# EAGLE board Qwiic Power Switch-Panel (EAGLE 9.6.2), part 1 of 5
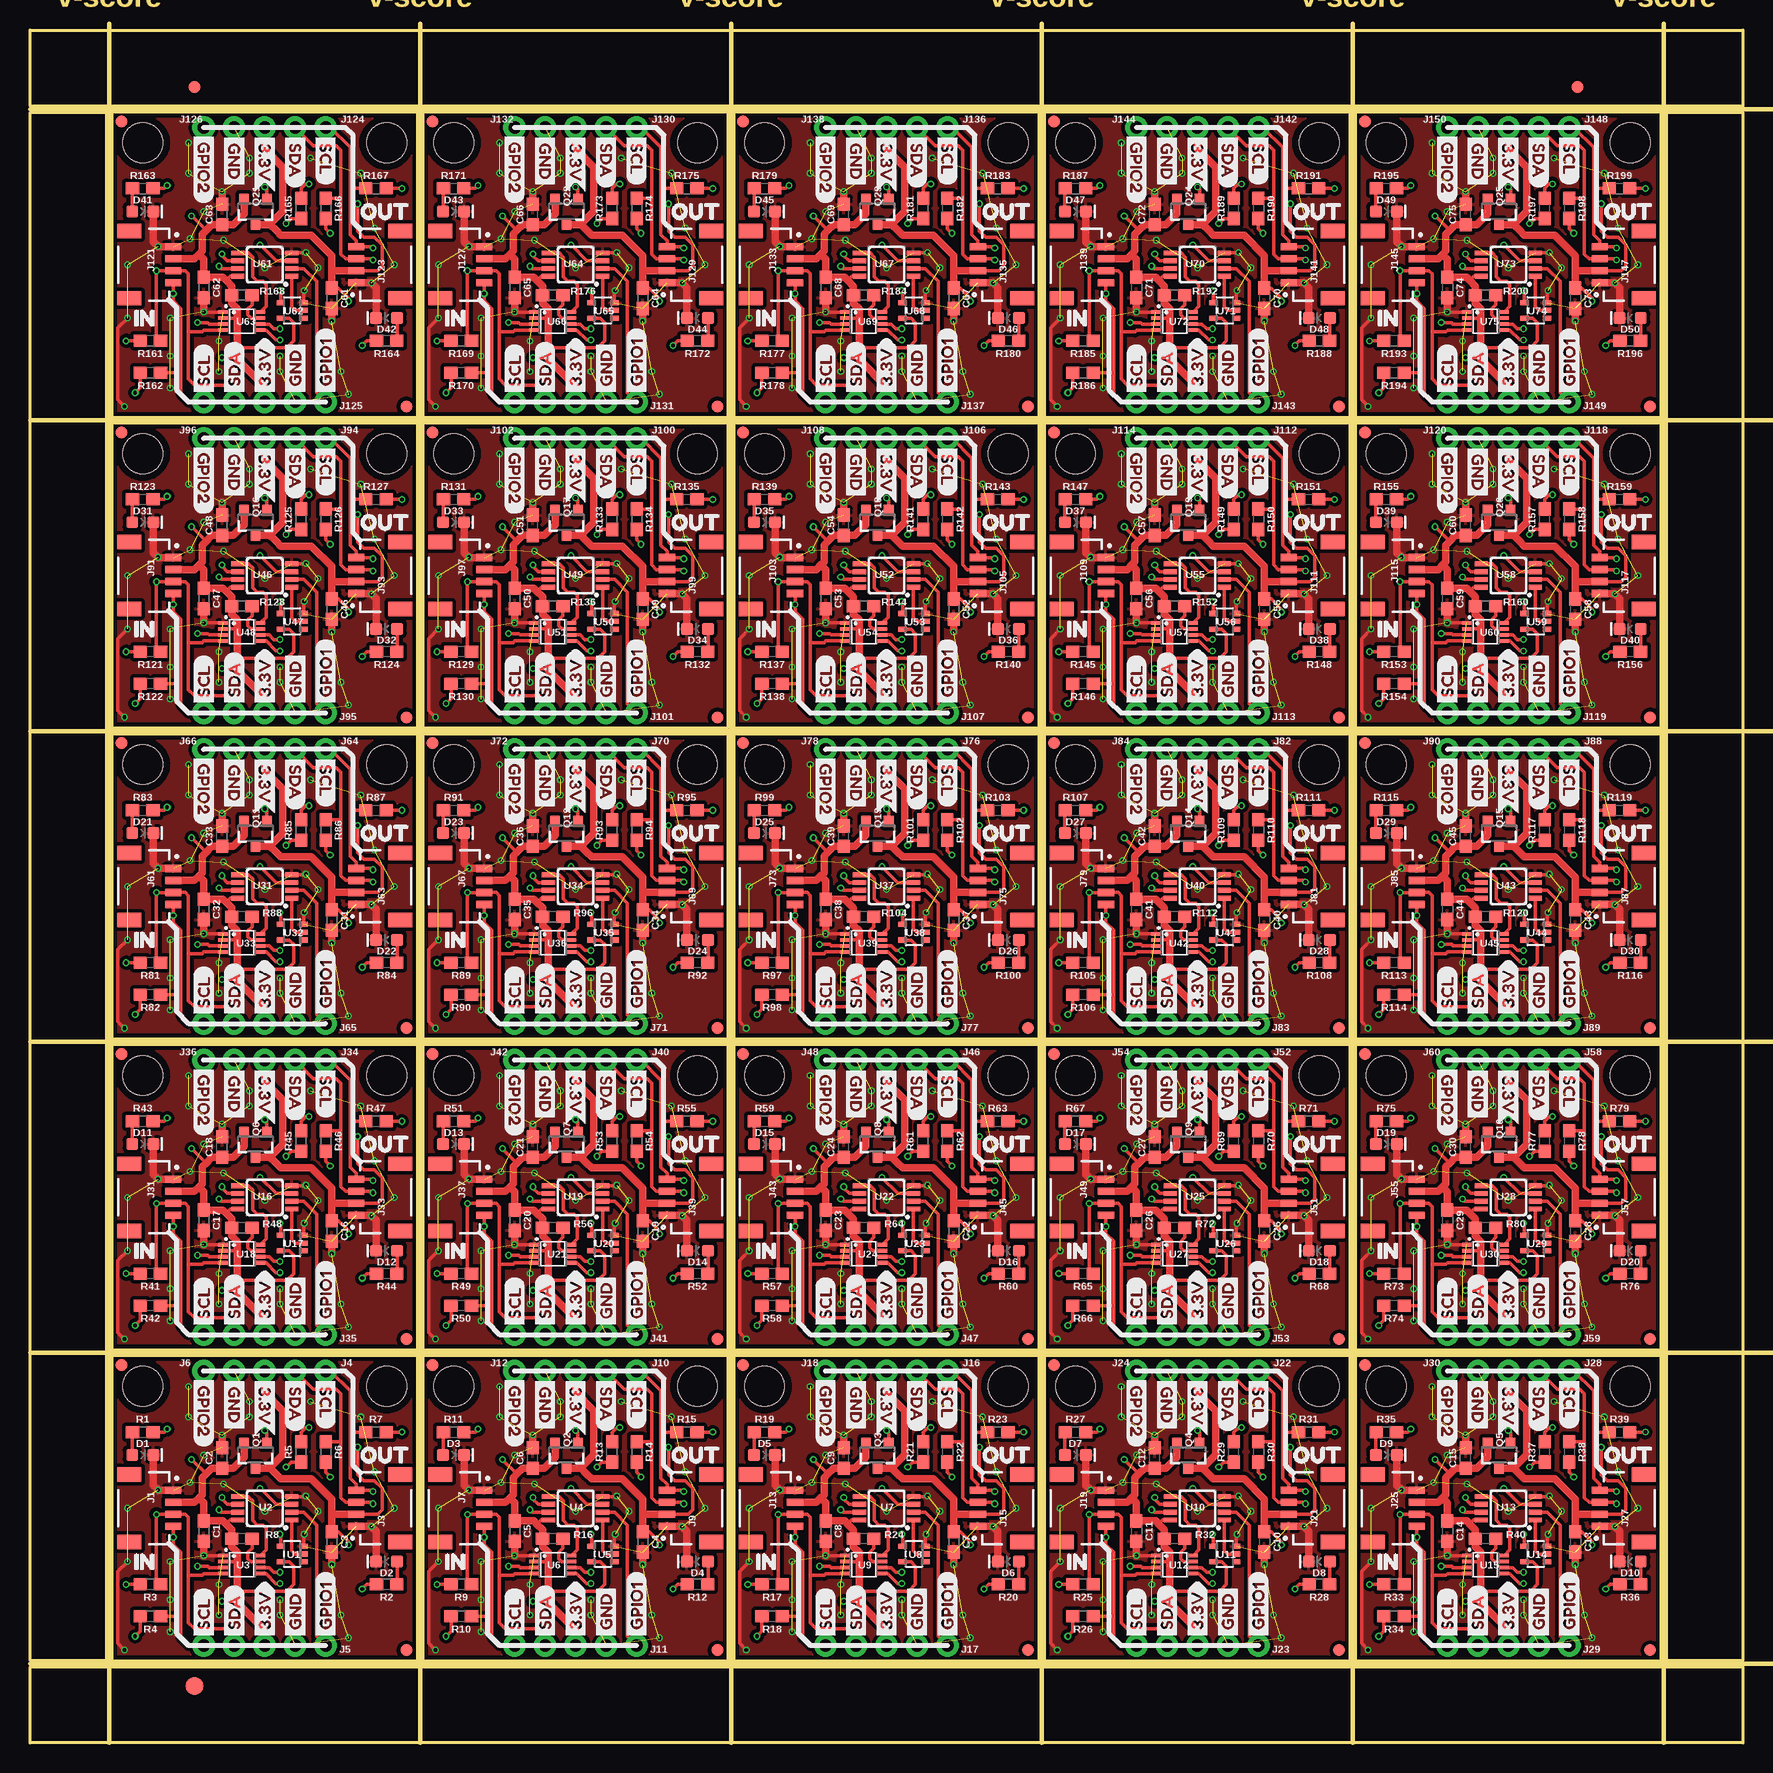
[diagram p0: board, top side]
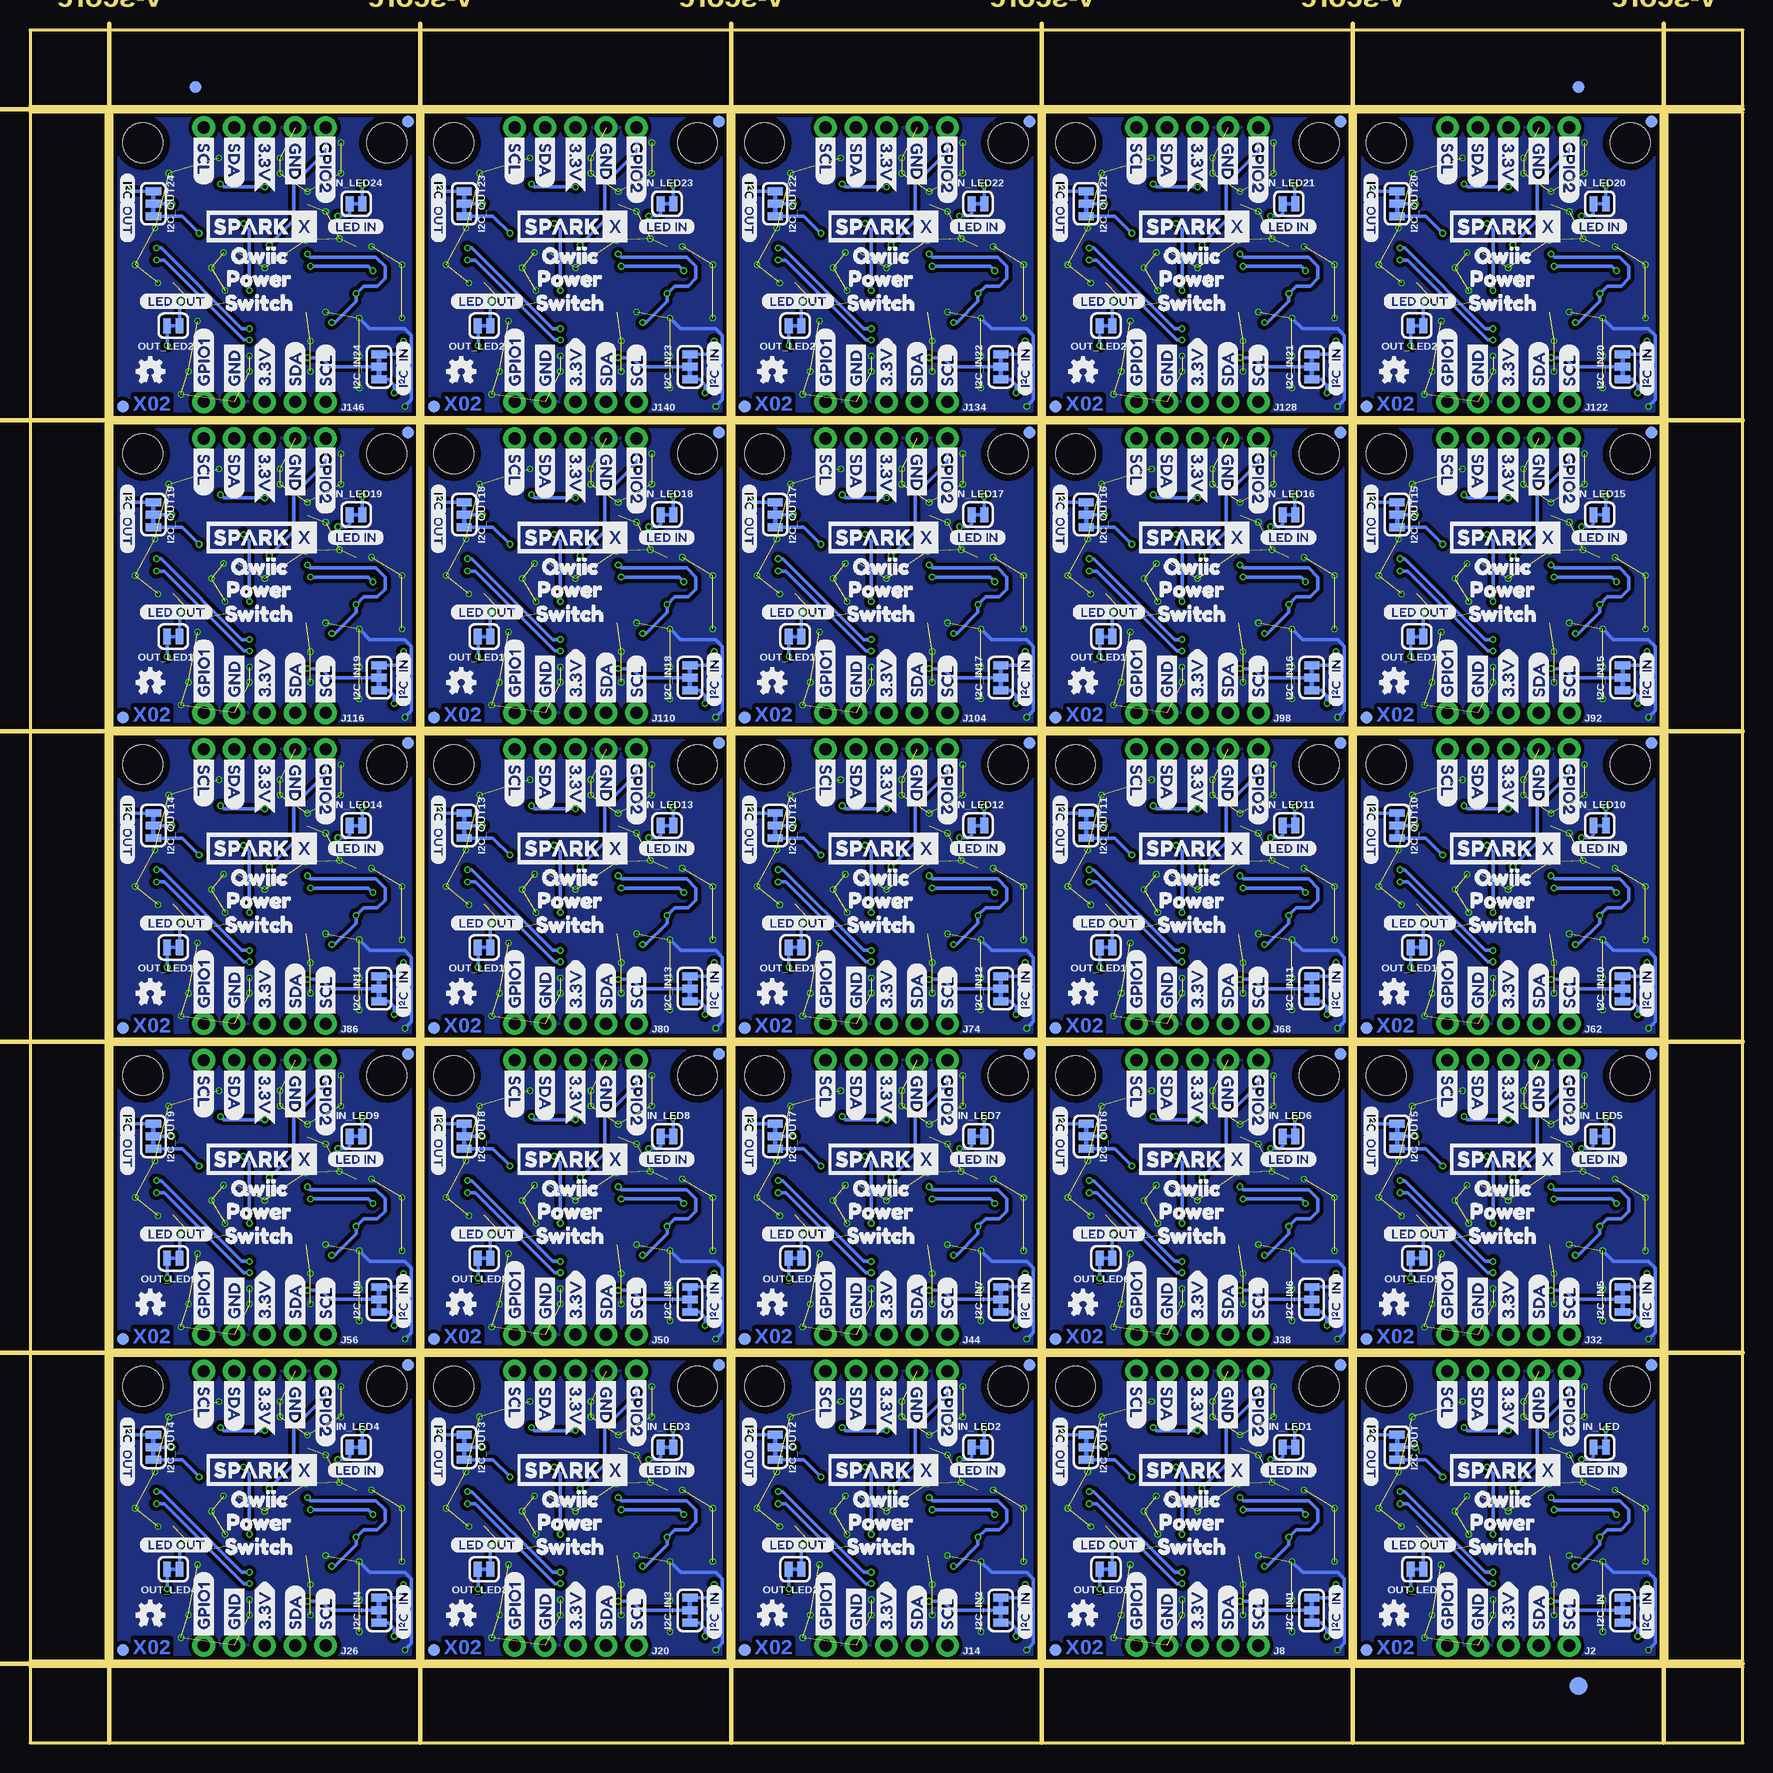
[diagram p1: board, bottom side, seen from below]

Size 142.75 x 142.75 mm. Coordinates in mm from the lower left corner, seen from the top.
Outline: 6.86,6.86 6.86,32.26 32.26,32.26 32.26,6.86 6.86,6.86
Outline: 32.77,6.86 32.77,32.26 58.17,32.26 58.17,6.86 32.77,6.86
Outline: 58.67,6.86 58.67,32.26 84.07,32.26 84.07,6.86 58.67,6.86
Outline: 84.58,6.86 84.58,32.26 109.98,32.26 109.98,6.86 84.58,6.86
Outline: 110.49,6.86 110.49,32.26 135.89,32.26 135.89,6.86 110.49,6.86
Outline: 6.86,32.77 6.86,58.17 32.26,58.17 32.26,32.77 6.86,32.77
Outline: 32.77,32.77 32.77,58.17 58.17,58.17 58.17,32.77 32.77,32.77
Outline: 58.67,32.77 58.67,58.17 84.07,58.17 84.07,32.77 58.67,32.77
Outline: 84.58,32.77 84.58,58.17 109.98,58.17 109.98,32.77 84.58,32.77
Outline: 110.49,32.77 110.49,58.17 135.89,58.17 135.89,32.77 110.49,32.77
Outline: 6.86,58.67 6.86,84.07 32.26,84.07 32.26,58.67 6.86,58.67
Outline: 32.77,58.67 32.77,84.07 58.17,84.07 58.17,58.67 32.77,58.67
Outline: 58.67,58.67 58.67,84.07 84.07,84.07 84.07,58.67 58.67,58.67
Outline: 84.58,58.67 84.58,84.07 109.98,84.07 109.98,58.67 84.58,58.67
Outline: 110.49,58.67 110.49,84.07 135.89,84.07 135.89,58.67 110.49,58.67
Outline: 6.86,84.58 6.86,109.98 32.26,109.98 32.26,84.58 6.86,84.58
Outline: 32.77,84.58 32.77,109.98 58.17,109.98 58.17,84.58 32.77,84.58
Outline: 58.67,84.58 58.67,109.98 84.07,109.98 84.07,84.58 58.67,84.58
Outline: 84.58,84.58 84.58,109.98 109.98,109.98 109.98,84.58 84.58,84.58
Outline: 110.49,84.58 110.49,109.98 135.89,109.98 135.89,84.58 110.49,84.58
Outline: 6.86,110.49 6.86,135.89 32.26,135.89 32.26,110.49 6.86,110.49
Outline: 32.77,110.49 32.77,135.89 58.17,135.89 58.17,110.49 32.77,110.49
Outline: 58.67,110.49 58.67,135.89 84.07,135.89 84.07,110.49 58.67,110.49
Outline: 84.58,110.49 84.58,135.89 109.98,135.89 109.98,110.49 84.58,110.49
Outline: 110.49,110.49 110.49,135.89 135.89,135.89 135.89,110.49 110.49,110.49
Outline: 0,6.35 142.75,6.35 142.75,0 0,0 0,6.35
Outline: 136.4,135.89 142.75,135.89 142.75,6.86 136.4,6.86 136.4,135.89
Outline: 0,142.75 142.75,142.75 142.75,136.4 0,136.4 0,142.75
Outline: 0,135.89 6.35,135.89 6.35,6.86 0,6.86 0,135.89
Copper layers (1*16): Top 0.035mm / dielectric 1.5mm / Bottom 0.035mm
Design rules "Qwiic Power Switch": minimum track width 5mil, minimum drill 0.3mm, track to track 5mil, track to pad 5mil, pad to pad 5mil, via to via 5mil, smd to smd 5mil, copper to edge 7mil, drill to drill 7mil, minimum pad ring 5mil, minimum via ring 5mil, stop-mask expansion 2.5mil, vias tented up to drill 25mil, thermal gap 10mil
Milling: 12 lines

## Footprints (pad centres in the part's own frame; a part is rotated, then mirrored left to right if it is on the bottom)
0603 = smd 1.1 x 1: 1 -0.85,0; 2 0.85,0
LED-0603 = smd 1 x 1: A -0.877,0; C 0.877,0
FIDUCIAL-1X2 = smd 1 x 1: 1 0,0
FIDUCIAL-1.5X3 = smd 1.5 x 1.5: 1 0,0
SMT-JUMPER_3_2-NC_TRACE_SILK = smd 0.66 x 1.27: 1 -1.041,0; 2 0,0; 3 1.041,0
SMT-JUMPER_2_NC_TRACE_SILK = smd 0.66 x 1.27: 1 -0.521,0; 2 0.521,0
JST04_1MM_RA = smd 0.6 x 1.35: 1 -1.5,0; 2 -0.5,0; 3 0.5,0; 4 1.5,0 | smd 1.2 x 2: NC1 2.8,-3.675; NC2 -2.8,-3.675
1X04_NO_SILK = drill 1.016 pad 1.88: 1 0,0; 2 2.54,0; 3 5.08,0; 4 7.62,0
1X01_NO_SILK = drill 1.016 pad 1.88: 1 0,0
STAND-OFF = hole 3.302: 0,0
SOT23-3 = smd 0.8 x 0.9: 1 -0.95,-1; 2 0.95,-1; 3 0,1.1
SOT353 = smd 0.42 x 0.7: 1 -0.65,-0.95; 2 0,-0.95; 3 0.65,-0.95; 4 0.65,0.95; 5 -0.65,0.95
MSOP8 = smd 1.1 x 0.4: 1 -2.25,0.975; 2 -2.25,0.325; 3 -2.25,-0.325; 4 -2.25,-0.975; 5 2.25,-0.975; 6 2.25,-0.325; 7 2.25,0.325; 8 2.25,0.975
VSSOP_8PIN = smd 0.8 x 0.3: P1 -1.55,0.75; P2 -1.55,0.25; P3 -1.55,-0.25; P4 -1.55,-0.75; P5 1.55,-0.75; P6 1.55,-0.25; P7 1.55,0.25; P8 1.55,0.75

## Placement (x,y rotation side)
C1  0.1uF  [0603]  14.48,17.65 270 top
C2  10uF  [0603]  16,23.75 90 top
C3  0.1uF  [0603]  25.15,16.76 270 top
C4  0.1uF  [0603]  51.05,16.76 270 top
C5  0.1uF  [0603]  40.39,17.65 270 top
C6  10uF  [0603]  41.91,23.75 90 top
C7  0.1uF  [0603]  76.96,16.76 270 top
C8  0.1uF  [0603]  66.29,17.65 270 top
C9  10uF  [0603]  67.82,23.75 90 top
C10  0.1uF  [0603]  102.87,16.76 270 top
C11  0.1uF  [0603]  92.2,17.65 270 top
C12  10uF  [0603]  93.73,23.75 90 top
C13  0.1uF  [0603]  128.78,16.76 270 top
C14  0.1uF  [0603]  118.11,17.65 270 top
C15  10uF  [0603]  119.63,23.75 90 top
C16  0.1uF  [0603]  25.15,42.67 270 top
C17  0.1uF  [0603]  14.48,43.56 270 top
C18  10uF  [0603]  16,49.66 90 top
C19  0.1uF  [0603]  51.05,42.67 270 top
C20  0.1uF  [0603]  40.39,43.56 270 top
C21  10uF  [0603]  41.91,49.66 90 top
C22  0.1uF  [0603]  76.96,42.67 270 top
C23  0.1uF  [0603]  66.29,43.56 270 top
C24  10uF  [0603]  67.82,49.66 90 top
C25  0.1uF  [0603]  102.87,42.67 270 top
C26  0.1uF  [0603]  92.2,43.56 270 top
C27  10uF  [0603]  93.73,49.66 90 top
C28  0.1uF  [0603]  128.78,42.67 270 top
C29  0.1uF  [0603]  118.11,43.56 270 top
C30  10uF  [0603]  119.63,49.66 90 top
C31  0.1uF  [0603]  25.15,68.58 270 top
C32  0.1uF  [0603]  14.48,69.47 270 top
C33  10uF  [0603]  16,75.56 90 top
C34  0.1uF  [0603]  51.05,68.58 270 top
C35  0.1uF  [0603]  40.39,69.47 270 top
C36  10uF  [0603]  41.91,75.56 90 top
C37  0.1uF  [0603]  76.96,68.58 270 top
C38  0.1uF  [0603]  66.29,69.47 270 top
C39  10uF  [0603]  67.82,75.56 90 top
C40  0.1uF  [0603]  102.87,68.58 270 top
C41  0.1uF  [0603]  92.2,69.47 270 top
C42  10uF  [0603]  93.73,75.56 90 top
C43  0.1uF  [0603]  128.78,68.58 270 top
C44  0.1uF  [0603]  118.11,69.47 270 top
C45  10uF  [0603]  119.63,75.56 90 top
C46  0.1uF  [0603]  25.15,94.49 270 top
C47  0.1uF  [0603]  14.48,95.38 270 top
C48  10uF  [0603]  16,101.47 90 top
C49  0.1uF  [0603]  51.05,94.49 270 top
C50  0.1uF  [0603]  40.39,95.38 270 top
C51  10uF  [0603]  41.91,101.47 90 top
C52  0.1uF  [0603]  76.96,94.49 270 top
C53  0.1uF  [0603]  66.29,95.38 270 top
C54  10uF  [0603]  67.82,101.47 90 top
C55  0.1uF  [0603]  102.87,94.49 270 top
C56  0.1uF  [0603]  92.2,95.38 270 top
C57  10uF  [0603]  93.73,101.47 90 top
C58  0.1uF  [0603]  128.78,94.49 270 top
C59  0.1uF  [0603]  118.11,95.38 270 top
C60  10uF  [0603]  119.63,101.47 90 top
C61  0.1uF  [0603]  25.15,120.4 270 top
C62  0.1uF  [0603]  14.48,121.29 270 top
C63  10uF  [0603]  16,127.38 90 top
C64  0.1uF  [0603]  51.05,120.4 270 top
C65  0.1uF  [0603]  40.39,121.29 270 top
C66  10uF  [0603]  41.91,127.38 90 top
C67  0.1uF  [0603]  76.96,120.4 270 top
C68  0.1uF  [0603]  66.29,121.29 270 top
C69  10uF  [0603]  67.82,127.38 90 top
C70  0.1uF  [0603]  102.87,120.4 270 top
C71  0.1uF  [0603]  92.2,121.29 270 top
C72  10uF  [0603]  93.73,127.38 90 top
C73  0.1uF  [0603]  128.78,120.4 270 top
C74  0.1uF  [0603]  118.11,121.29 270 top
C75  10uF  [0603]  119.63,127.38 90 top
D1  RED  [LED-0603]  9.4,24 0 top
D2  GREEN  [LED-0603]  29.72,15.11 180 top
D3  RED  [LED-0603]  35.31,24 0 top
D4  GREEN  [LED-0603]  55.63,15.11 180 top
D5  RED  [LED-0603]  61.21,24 0 top
D6  GREEN  [LED-0603]  81.53,15.11 180 top
D7  RED  [LED-0603]  87.12,24 0 top
D8  GREEN  [LED-0603]  107.44,15.11 180 top
D9  RED  [LED-0603]  113.03,24 0 top
D10  GREEN  [LED-0603]  133.35,15.11 180 top
D11  RED  [LED-0603]  9.4,49.91 0 top
D12  GREEN  [LED-0603]  29.72,41.02 180 top
D13  RED  [LED-0603]  35.31,49.91 0 top
D14  GREEN  [LED-0603]  55.63,41.02 180 top
D15  RED  [LED-0603]  61.21,49.91 0 top
D16  GREEN  [LED-0603]  81.53,41.02 180 top
D17  RED  [LED-0603]  87.12,49.91 0 top
D18  GREEN  [LED-0603]  107.44,41.02 180 top
D19  RED  [LED-0603]  113.03,49.91 0 top
D20  GREEN  [LED-0603]  133.35,41.02 180 top
D21  RED  [LED-0603]  9.4,75.82 0 top
D22  GREEN  [LED-0603]  29.72,66.93 180 top
D23  RED  [LED-0603]  35.31,75.82 0 top
D24  GREEN  [LED-0603]  55.63,66.93 180 top
D25  RED  [LED-0603]  61.21,75.82 0 top
D26  GREEN  [LED-0603]  81.53,66.93 180 top
D27  RED  [LED-0603]  87.12,75.82 0 top
D28  GREEN  [LED-0603]  107.44,66.93 180 top
D29  RED  [LED-0603]  113.03,75.82 0 top
D30  GREEN  [LED-0603]  133.35,66.93 180 top
D31  RED  [LED-0603]  9.4,101.73 0 top
D32  GREEN  [LED-0603]  29.72,92.84 180 top
D33  RED  [LED-0603]  35.31,101.73 0 top
D34  GREEN  [LED-0603]  55.63,92.84 180 top
D35  RED  [LED-0603]  61.21,101.73 0 top
D36  GREEN  [LED-0603]  81.53,92.84 180 top
D37  RED  [LED-0603]  87.12,101.73 0 top
D38  GREEN  [LED-0603]  107.44,92.84 180 top
D39  RED  [LED-0603]  113.03,101.73 0 top
D40  GREEN  [LED-0603]  133.35,92.84 180 top
D41  RED  [LED-0603]  9.4,127.64 0 top
D42  GREEN  [LED-0603]  29.72,118.75 180 top
D43  RED  [LED-0603]  35.31,127.64 0 top
D44  GREEN  [LED-0603]  55.63,118.75 180 top
D45  RED  [LED-0603]  61.21,127.64 0 top
D46  GREEN  [LED-0603]  81.53,118.75 180 top
D47  RED  [LED-0603]  87.12,127.64 0 top
D48  GREEN  [LED-0603]  107.44,118.75 180 top
D49  RED  [LED-0603]  113.03,127.64 0 top
D50  GREEN  [LED-0603]  133.35,118.75 180 top
E$1  [FIDUCIAL-1X2]  13.72,137.99 0 top
E$2  [FIDUCIAL-1X2]  13.72,137.99 0 bottom
E$3  [FIDUCIAL-1X2]  128.97,137.99 0 top
E$4  [FIDUCIAL-1X2]  128.97,137.99 0 bottom
E$5  [FIDUCIAL-1.5X3]  13.72,4.76 0 top
E$6  [FIDUCIAL-1.5X3]  13.72,4.76 0 bottom
I2C_IN  JUMPER-SMT_3_2-NC_TRACE_SILK  [SMT-JUMPER_3_2-NC_TRACE_SILK]  10.03,11.05 90 bottom
I2C_IN1  JUMPER-SMT_3_2-NC_TRACE_SILK  [SMT-JUMPER_3_2-NC_TRACE_SILK]  35.94,11.05 90 bottom
I2C_IN2  JUMPER-SMT_3_2-NC_TRACE_SILK  [SMT-JUMPER_3_2-NC_TRACE_SILK]  61.85,11.05 90 bottom
I2C_IN3  JUMPER-SMT_3_2-NC_TRACE_SILK  [SMT-JUMPER_3_2-NC_TRACE_SILK]  87.76,11.05 90 bottom
I2C_IN4  JUMPER-SMT_3_2-NC_TRACE_SILK  [SMT-JUMPER_3_2-NC_TRACE_SILK]  113.67,11.05 90 bottom
I2C_IN5  JUMPER-SMT_3_2-NC_TRACE_SILK  [SMT-JUMPER_3_2-NC_TRACE_SILK]  10.03,36.96 90 bottom
I2C_IN6  JUMPER-SMT_3_2-NC_TRACE_SILK  [SMT-JUMPER_3_2-NC_TRACE_SILK]  35.94,36.96 90 bottom
I2C_IN7  JUMPER-SMT_3_2-NC_TRACE_SILK  [SMT-JUMPER_3_2-NC_TRACE_SILK]  61.85,36.96 90 bottom
I2C_IN8  JUMPER-SMT_3_2-NC_TRACE_SILK  [SMT-JUMPER_3_2-NC_TRACE_SILK]  87.76,36.96 90 bottom
I2C_IN9  JUMPER-SMT_3_2-NC_TRACE_SILK  [SMT-JUMPER_3_2-NC_TRACE_SILK]  113.67,36.96 90 bottom
I2C_IN10  JUMPER-SMT_3_2-NC_TRACE_SILK  [SMT-JUMPER_3_2-NC_TRACE_SILK]  10.03,62.86 90 bottom
I2C_IN11  JUMPER-SMT_3_2-NC_TRACE_SILK  [SMT-JUMPER_3_2-NC_TRACE_SILK]  35.94,62.86 90 bottom
I2C_IN12  JUMPER-SMT_3_2-NC_TRACE_SILK  [SMT-JUMPER_3_2-NC_TRACE_SILK]  61.85,62.86 90 bottom
I2C_IN13  JUMPER-SMT_3_2-NC_TRACE_SILK  [SMT-JUMPER_3_2-NC_TRACE_SILK]  87.76,62.86 90 bottom
I2C_IN14  JUMPER-SMT_3_2-NC_TRACE_SILK  [SMT-JUMPER_3_2-NC_TRACE_SILK]  113.67,62.86 90 bottom
I2C_IN15  JUMPER-SMT_3_2-NC_TRACE_SILK  [SMT-JUMPER_3_2-NC_TRACE_SILK]  10.03,88.77 90 bottom
I2C_IN16  JUMPER-SMT_3_2-NC_TRACE_SILK  [SMT-JUMPER_3_2-NC_TRACE_SILK]  35.94,88.77 90 bottom
I2C_IN17  JUMPER-SMT_3_2-NC_TRACE_SILK  [SMT-JUMPER_3_2-NC_TRACE_SILK]  61.85,88.77 90 bottom
I2C_IN18  JUMPER-SMT_3_2-NC_TRACE_SILK  [SMT-JUMPER_3_2-NC_TRACE_SILK]  87.76,88.77 90 bottom
I2C_IN19  JUMPER-SMT_3_2-NC_TRACE_SILK  [SMT-JUMPER_3_2-NC_TRACE_SILK]  113.67,88.77 90 bottom
I2C_IN20  JUMPER-SMT_3_2-NC_TRACE_SILK  [SMT-JUMPER_3_2-NC_TRACE_SILK]  10.03,114.68 90 bottom
I2C_IN21  JUMPER-SMT_3_2-NC_TRACE_SILK  [SMT-JUMPER_3_2-NC_TRACE_SILK]  35.94,114.68 90 bottom
I2C_IN22  JUMPER-SMT_3_2-NC_TRACE_SILK  [SMT-JUMPER_3_2-NC_TRACE_SILK]  61.85,114.68 90 bottom
I2C_IN23  JUMPER-SMT_3_2-NC_TRACE_SILK  [SMT-JUMPER_3_2-NC_TRACE_SILK]  87.76,114.68 90 bottom
I2C_IN24  JUMPER-SMT_3_2-NC_TRACE_SILK  [SMT-JUMPER_3_2-NC_TRACE_SILK]  113.67,114.68 90 bottom
I2C_OUT  JUMPER-SMT_3_2-NC_TRACE_SILK  [SMT-JUMPER_3_2-NC_TRACE_SILK]  28.83,24.64 270 bottom
I2C_OUT1  JUMPER-SMT_3_2-NC_TRACE_SILK  [SMT-JUMPER_3_2-NC_TRACE_SILK]  54.74,24.64 270 bottom
I2C_OUT2  JUMPER-SMT_3_2-NC_TRACE_SILK  [SMT-JUMPER_3_2-NC_TRACE_SILK]  80.65,24.64 270 bottom
I2C_OUT3  JUMPER-SMT_3_2-NC_TRACE_SILK  [SMT-JUMPER_3_2-NC_TRACE_SILK]  106.55,24.64 270 bottom
I2C_OUT4  JUMPER-SMT_3_2-NC_TRACE_SILK  [SMT-JUMPER_3_2-NC_TRACE_SILK]  132.46,24.64 270 bottom
I2C_OUT5  JUMPER-SMT_3_2-NC_TRACE_SILK  [SMT-JUMPER_3_2-NC_TRACE_SILK]  28.83,50.55 270 bottom
I2C_OUT6  JUMPER-SMT_3_2-NC_TRACE_SILK  [SMT-JUMPER_3_2-NC_TRACE_SILK]  54.74,50.55 270 bottom
I2C_OUT7  JUMPER-SMT_3_2-NC_TRACE_SILK  [SMT-JUMPER_3_2-NC_TRACE_SILK]  80.65,50.55 270 bottom
I2C_OUT8  JUMPER-SMT_3_2-NC_TRACE_SILK  [SMT-JUMPER_3_2-NC_TRACE_SILK]  106.55,50.55 270 bottom
I2C_OUT9  JUMPER-SMT_3_2-NC_TRACE_SILK  [SMT-JUMPER_3_2-NC_TRACE_SILK]  132.46,50.55 270 bottom
I2C_OUT10  JUMPER-SMT_3_2-NC_TRACE_SILK  [SMT-JUMPER_3_2-NC_TRACE_SILK]  28.83,76.45 270 bottom
I2C_OUT11  JUMPER-SMT_3_2-NC_TRACE_SILK  [SMT-JUMPER_3_2-NC_TRACE_SILK]  54.74,76.45 270 bottom
I2C_OUT12  JUMPER-SMT_3_2-NC_TRACE_SILK  [SMT-JUMPER_3_2-NC_TRACE_SILK]  80.65,76.45 270 bottom
I2C_OUT13  JUMPER-SMT_3_2-NC_TRACE_SILK  [SMT-JUMPER_3_2-NC_TRACE_SILK]  106.55,76.45 270 bottom
I2C_OUT14  JUMPER-SMT_3_2-NC_TRACE_SILK  [SMT-JUMPER_3_2-NC_TRACE_SILK]  132.46,76.45 270 bottom
I2C_OUT15  JUMPER-SMT_3_2-NC_TRACE_SILK  [SMT-JUMPER_3_2-NC_TRACE_SILK]  28.83,102.36 270 bottom
I2C_OUT16  JUMPER-SMT_3_2-NC_TRACE_SILK  [SMT-JUMPER_3_2-NC_TRACE_SILK]  54.74,102.36 270 bottom
I2C_OUT17  JUMPER-SMT_3_2-NC_TRACE_SILK  [SMT-JUMPER_3_2-NC_TRACE_SILK]  80.65,102.36 270 bottom
I2C_OUT18  JUMPER-SMT_3_2-NC_TRACE_SILK  [SMT-JUMPER_3_2-NC_TRACE_SILK]  106.55,102.36 270 bottom
I2C_OUT19  JUMPER-SMT_3_2-NC_TRACE_SILK  [SMT-JUMPER_3_2-NC_TRACE_SILK]  132.46,102.36 270 bottom
I2C_OUT20  JUMPER-SMT_3_2-NC_TRACE_SILK  [SMT-JUMPER_3_2-NC_TRACE_SILK]  28.83,128.27 270 bottom
I2C_OUT21  JUMPER-SMT_3_2-NC_TRACE_SILK  [SMT-JUMPER_3_2-NC_TRACE_SILK]  54.74,128.27 270 bottom
I2C_OUT22  JUMPER-SMT_3_2-NC_TRACE_SILK  [SMT-JUMPER_3_2-NC_TRACE_SILK]  80.65,128.27 270 bottom
I2C_OUT23  JUMPER-SMT_3_2-NC_TRACE_SILK  [SMT-JUMPER_3_2-NC_TRACE_SILK]  106.55,128.27 270 bottom
I2C_OUT24  JUMPER-SMT_3_2-NC_TRACE_SILK  [SMT-JUMPER_3_2-NC_TRACE_SILK]  132.46,128.27 270 bottom
IN_LED  IN_LED  [SMT-JUMPER_2_NC_TRACE_SILK]  11.94,24.64 180 bottom
IN_LED1  IN_LED  [SMT-JUMPER_2_NC_TRACE_SILK]  37.85,24.64 180 bottom
IN_LED2  IN_LED  [SMT-JUMPER_2_NC_TRACE_SILK]  63.75,24.64 180 bottom
IN_LED3  IN_LED  [SMT-JUMPER_2_NC_TRACE_SILK]  89.66,24.64 180 bottom
IN_LED4  IN_LED  [SMT-JUMPER_2_NC_TRACE_SILK]  115.57,24.64 180 bottom
IN_LED5  IN_LED  [SMT-JUMPER_2_NC_TRACE_SILK]  11.94,50.55 180 bottom
IN_LED6  IN_LED  [SMT-JUMPER_2_NC_TRACE_SILK]  37.85,50.55 180 bottom
IN_LED7  IN_LED  [SMT-JUMPER_2_NC_TRACE_SILK]  63.75,50.55 180 bottom
IN_LED8  IN_LED  [SMT-JUMPER_2_NC_TRACE_SILK]  89.66,50.55 180 bottom
IN_LED9  IN_LED  [SMT-JUMPER_2_NC_TRACE_SILK]  115.57,50.55 180 bottom
IN_LED10  IN_LED  [SMT-JUMPER_2_NC_TRACE_SILK]  11.94,76.45 180 bottom
IN_LED11  IN_LED  [SMT-JUMPER_2_NC_TRACE_SILK]  37.85,76.45 180 bottom
IN_LED12  IN_LED  [SMT-JUMPER_2_NC_TRACE_SILK]  63.75,76.45 180 bottom
IN_LED13  IN_LED  [SMT-JUMPER_2_NC_TRACE_SILK]  89.66,76.45 180 bottom
IN_LED14  IN_LED  [SMT-JUMPER_2_NC_TRACE_SILK]  115.57,76.45 180 bottom
IN_LED15  IN_LED  [SMT-JUMPER_2_NC_TRACE_SILK]  11.94,102.36 180 bottom
IN_LED16  IN_LED  [SMT-JUMPER_2_NC_TRACE_SILK]  37.85,102.36 180 bottom
IN_LED17  IN_LED  [SMT-JUMPER_2_NC_TRACE_SILK]  63.75,102.36 180 bottom
IN_LED18  IN_LED  [SMT-JUMPER_2_NC_TRACE_SILK]  89.66,102.36 180 bottom
IN_LED19  IN_LED  [SMT-JUMPER_2_NC_TRACE_SILK]  115.57,102.36 180 bottom
IN_LED20  IN_LED  [SMT-JUMPER_2_NC_TRACE_SILK]  11.94,128.27 180 bottom
IN_LED21  IN_LED  [SMT-JUMPER_2_NC_TRACE_SILK]  37.85,128.27 180 bottom
IN_LED22  IN_LED  [SMT-JUMPER_2_NC_TRACE_SILK]  63.75,128.27 180 bottom
IN_LED23  IN_LED  [SMT-JUMPER_2_NC_TRACE_SILK]  89.66,128.27 180 bottom
IN_LED24  IN_LED  [SMT-JUMPER_2_NC_TRACE_SILK]  115.57,128.27 180 bottom
J1  Qwiic Right Angle  [JST04_1MM_RA]  11.94,19.56 270 top
J2  PTH  [1X04_NO_SILK]  22.1,8.13 0 bottom
J3  Qwiic Right Angle  [JST04_1MM_RA]  27.18,19.56 90 top
J4  PTH  [1X04_NO_SILK]  17.02,30.99 0 top
J5  [1X01_NO_SILK]  24.64,8.13 0 top
J6  [1X01_NO_SILK]  14.48,30.99 0 top
J7  Qwiic Right Angle  [JST04_1MM_RA]  37.85,19.56 270 top
J8  PTH  [1X04_NO_SILK]  48.01,8.13 0 bottom
J9  Qwiic Right Angle  [JST04_1MM_RA]  53.09,19.56 90 top
J10  PTH  [1X04_NO_SILK]  42.93,30.99 0 top
J11  [1X01_NO_SILK]  50.55,8.13 0 top
J12  [1X01_NO_SILK]  40.39,30.99 0 top
J13  Qwiic Right Angle  [JST04_1MM_RA]  63.75,19.56 270 top
J14  PTH  [1X04_NO_SILK]  73.91,8.13 0 bottom
J15  Qwiic Right Angle  [JST04_1MM_RA]  78.99,19.56 90 top
J16  PTH  [1X04_NO_SILK]  68.83,30.99 0 top
J17  [1X01_NO_SILK]  76.45,8.13 0 top
J18  [1X01_NO_SILK]  66.29,30.99 0 top
J19  Qwiic Right Angle  [JST04_1MM_RA]  89.66,19.56 270 top
J20  PTH  [1X04_NO_SILK]  99.82,8.13 0 bottom
J21  Qwiic Right Angle  [JST04_1MM_RA]  104.9,19.56 90 top
J22  PTH  [1X04_NO_SILK]  94.74,30.99 0 top
J23  [1X01_NO_SILK]  102.36,8.13 0 top
J24  [1X01_NO_SILK]  92.2,30.99 0 top
J25  Qwiic Right Angle  [JST04_1MM_RA]  115.57,19.56 270 top
J26  PTH  [1X04_NO_SILK]  125.73,8.13 0 bottom
J27  Qwiic Right Angle  [JST04_1MM_RA]  130.81,19.56 90 top
J28  PTH  [1X04_NO_SILK]  120.65,30.99 0 top
J29  [1X01_NO_SILK]  128.27,8.13 0 top
J30  [1X01_NO_SILK]  118.11,30.99 0 top
J31  Qwiic Right Angle  [JST04_1MM_RA]  11.94,45.47 270 top
J32  PTH  [1X04_NO_SILK]  22.1,34.04 0 bottom
J33  Qwiic Right Angle  [JST04_1MM_RA]  27.18,45.47 90 top
J34  PTH  [1X04_NO_SILK]  17.02,56.9 0 top
J35  [1X01_NO_SILK]  24.64,34.04 0 top
J36  [1X01_NO_SILK]  14.48,56.9 0 top
J37  Qwiic Right Angle  [JST04_1MM_RA]  37.85,45.47 270 top
J38  PTH  [1X04_NO_SILK]  48.01,34.04 0 bottom
J39  Qwiic Right Angle  [JST04_1MM_RA]  53.09,45.47 90 top
J40  PTH  [1X04_NO_SILK]  42.93,56.9 0 top
J41  [1X01_NO_SILK]  50.55,34.04 0 top
J42  [1X01_NO_SILK]  40.39,56.9 0 top
J43  Qwiic Right Angle  [JST04_1MM_RA]  63.75,45.47 270 top
J44  PTH  [1X04_NO_SILK]  73.91,34.04 0 bottom
J45  Qwiic Right Angle  [JST04_1MM_RA]  78.99,45.47 90 top
J46  PTH  [1X04_NO_SILK]  68.83,56.9 0 top
J47  [1X01_NO_SILK]  76.45,34.04 0 top
J48  [1X01_NO_SILK]  66.29,56.9 0 top
J49  Qwiic Right Angle  [JST04_1MM_RA]  89.66,45.47 270 top
J50  PTH  [1X04_NO_SILK]  99.82,34.04 0 bottom
J51  Qwiic Right Angle  [JST04_1MM_RA]  104.9,45.47 90 top
J52  PTH  [1X04_NO_SILK]  94.74,56.9 0 top
J53  [1X01_NO_SILK]  102.36,34.04 0 top
J54  [1X01_NO_SILK]  92.2,56.9 0 top
J55  Qwiic Right Angle  [JST04_1MM_RA]  115.57,45.47 270 top
J56  PTH  [1X04_NO_SILK]  125.73,34.04 0 bottom
J57  Qwiic Right Angle  [JST04_1MM_RA]  130.81,45.47 90 top
J58  PTH  [1X04_NO_SILK]  120.65,56.9 0 top
J59  [1X01_NO_SILK]  128.27,34.04 0 top
J60  [1X01_NO_SILK]  118.11,56.9 0 top
J61  Qwiic Right Angle  [JST04_1MM_RA]  11.94,71.37 270 top
J62  PTH  [1X04_NO_SILK]  22.1,59.94 0 bottom
J63  Qwiic Right Angle  [JST04_1MM_RA]  27.18,71.37 90 top
J64  PTH  [1X04_NO_SILK]  17.02,82.8 0 top
J65  [1X01_NO_SILK]  24.64,59.94 0 top
J66  [1X01_NO_SILK]  14.48,82.8 0 top
J67  Qwiic Right Angle  [JST04_1MM_RA]  37.85,71.37 270 top
J68  PTH  [1X04_NO_SILK]  48.01,59.94 0 bottom
J69  Qwiic Right Angle  [JST04_1MM_RA]  53.09,71.37 90 top
J70  PTH  [1X04_NO_SILK]  42.93,82.8 0 top
J71  [1X01_NO_SILK]  50.55,59.94 0 top
J72  [1X01_NO_SILK]  40.39,82.8 0 top
J73  Qwiic Right Angle  [JST04_1MM_RA]  63.75,71.37 270 top
J74  PTH  [1X04_NO_SILK]  73.91,59.94 0 bottom
J75  Qwiic Right Angle  [JST04_1MM_RA]  78.99,71.37 90 top
J76  PTH  [1X04_NO_SILK]  68.83,82.8 0 top
J77  [1X01_NO_SILK]  76.45,59.94 0 top
J78  [1X01_NO_SILK]  66.29,82.8 0 top
J79  Qwiic Right Angle  [JST04_1MM_RA]  89.66,71.37 270 top
J80  PTH  [1X04_NO_SILK]  99.82,59.94 0 bottom
J81  Qwiic Right Angle  [JST04_1MM_RA]  104.9,71.37 90 top
J82  PTH  [1X04_NO_SILK]  94.74,82.8 0 top
J83  [1X01_NO_SILK]  102.36,59.94 0 top
J84  [1X01_NO_SILK]  92.2,82.8 0 top
J85  Qwiic Right Angle  [JST04_1MM_RA]  115.57,71.37 270 top
J86  PTH  [1X04_NO_SILK]  125.73,59.94 0 bottom
J87  Qwiic Right Angle  [JST04_1MM_RA]  130.81,71.37 90 top
J88  PTH  [1X04_NO_SILK]  120.65,82.8 0 top
J89  [1X01_NO_SILK]  128.27,59.94 0 top
J90  [1X01_NO_SILK]  118.11,82.8 0 top
J91  Qwiic Right Angle  [JST04_1MM_RA]  11.94,97.28 270 top
J92  PTH  [1X04_NO_SILK]  22.1,85.85 0 bottom
J93  Qwiic Right Angle  [JST04_1MM_RA]  27.18,97.28 90 top
J94  PTH  [1X04_NO_SILK]  17.02,108.71 0 top
J95  [1X01_NO_SILK]  24.64,85.85 0 top
J96  [1X01_NO_SILK]  14.48,108.71 0 top
J97  Qwiic Right Angle  [JST04_1MM_RA]  37.85,97.28 270 top
J98  PTH  [1X04_NO_SILK]  48.01,85.85 0 bottom
J99  Qwiic Right Angle  [JST04_1MM_RA]  53.09,97.28 90 top
J100  PTH  [1X04_NO_SILK]  42.93,108.71 0 top
J101  [1X01_NO_SILK]  50.55,85.85 0 top
J102  [1X01_NO_SILK]  40.39,108.71 0 top
J103  Qwiic Right Angle  [JST04_1MM_RA]  63.75,97.28 270 top
J104  PTH  [1X04_NO_SILK]  73.91,85.85 0 bottom
J105  Qwiic Right Angle  [JST04_1MM_RA]  78.99,97.28 90 top
J106  PTH  [1X04_NO_SILK]  68.83,108.71 0 top
J107  [1X01_NO_SILK]  76.45,85.85 0 top
J108  [1X01_NO_SILK]  66.29,108.71 0 top
J109  Qwiic Right Angle  [JST04_1MM_RA]  89.66,97.28 270 top
J110  PTH  [1X04_NO_SILK]  99.82,85.85 0 bottom
J111  Qwiic Right Angle  [JST04_1MM_RA]  104.9,97.28 90 top
J112  PTH  [1X04_NO_SILK]  94.74,108.71 0 top
J113  [1X01_NO_SILK]  102.36,85.85 0 top
J114  [1X01_NO_SILK]  92.2,108.71 0 top
J115  Qwiic Right Angle  [JST04_1MM_RA]  115.57,97.28 270 top
J116  PTH  [1X04_NO_SILK]  125.73,85.85 0 bottom
J117  Qwiic Right Angle  [JST04_1MM_RA]  130.81,97.28 90 top
J118  PTH  [1X04_NO_SILK]  120.65,108.71 0 top
J119  [1X01_NO_SILK]  128.27,85.85 0 top
J120  [1X01_NO_SILK]  118.11,108.71 0 top
J121  Qwiic Right Angle  [JST04_1MM_RA]  11.94,123.19 270 top
J122  PTH  [1X04_NO_SILK]  22.1,111.76 0 bottom
J123  Qwiic Right Angle  [JST04_1MM_RA]  27.18,123.19 90 top
J124  PTH  [1X04_NO_SILK]  17.02,134.62 0 top
J125  [1X01_NO_SILK]  24.64,111.76 0 top
J126  [1X01_NO_SILK]  14.48,134.62 0 top
J127  Qwiic Right Angle  [JST04_1MM_RA]  37.85,123.19 270 top
J128  PTH  [1X04_NO_SILK]  48.01,111.76 0 bottom
J129  Qwiic Right Angle  [JST04_1MM_RA]  53.09,123.19 90 top
J130  PTH  [1X04_NO_SILK]  42.93,134.62 0 top
J131  [1X01_NO_SILK]  50.55,111.76 0 top
J132  [1X01_NO_SILK]  40.39,134.62 0 top
J133  Qwiic Right Angle  [JST04_1MM_RA]  63.75,123.19 270 top
J134  PTH  [1X04_NO_SILK]  73.91,111.76 0 bottom
J135  Qwiic Right Angle  [JST04_1MM_RA]  78.99,123.19 90 top
J136  PTH  [1X04_NO_SILK]  68.83,134.62 0 top
J137  [1X01_NO_SILK]  76.45,111.76 0 top
J138  [1X01_NO_SILK]  66.29,134.62 0 top
J139  Qwiic Right Angle  [JST04_1MM_RA]  89.66,123.19 270 top
J140  PTH  [1X04_NO_SILK]  99.82,111.76 0 bottom
J141  Qwiic Right Angle  [JST04_1MM_RA]  104.9,123.19 90 top
J142  PTH  [1X04_NO_SILK]  94.74,134.62 0 top
J143  [1X01_NO_SILK]  102.36,111.76 0 top
J144  [1X01_NO_SILK]  92.2,134.62 0 top
J145  Qwiic Right Angle  [JST04_1MM_RA]  115.57,123.19 270 top
J146  PTH  [1X04_NO_SILK]  125.73,111.76 0 bottom
J147  Qwiic Right Angle  [JST04_1MM_RA]  130.81,123.19 90 top
J148  PTH  [1X04_NO_SILK]  120.65,134.62 0 top
J149  [1X01_NO_SILK]  128.27,111.76 0 top
J150  [1X01_NO_SILK]  118.11,134.62 0 top
JP1  FIDUCIAL1X2  [FIDUCIAL-1X2]  7.62,31.5 0 bottom
JP2  FIDUCIAL1X2  [FIDUCIAL-1X2]  31.37,7.75 0 top
JP3  STAND-OFF  [STAND-OFF]  9.4,29.72 0 top
JP4  STAND-OFF  [STAND-OFF]  29.72,29.72 0 top
JP5  FIDUCIAL1X2  [FIDUCIAL-1X2]  31.37,7.75 0 bottom
JP6  FIDUCIAL1X2  [FIDUCIAL-1X2]  7.62,31.5 0 top
JP7  STAND-OFF  [STAND-OFF]  35.31,29.72 0 top
JP8  STAND-OFF  [STAND-OFF]  55.63,29.72 0 top
JP9  FIDUCIAL1X2  [FIDUCIAL-1X2]  57.28,7.75 0 top
JP10  FIDUCIAL1X2  [FIDUCIAL-1X2]  33.53,31.5 0 top
JP11  FIDUCIAL1X2  [FIDUCIAL-1X2]  33.53,31.5 0 bottom
JP12  FIDUCIAL1X2  [FIDUCIAL-1X2]  57.28,7.75 0 bottom
JP13  STAND-OFF  [STAND-OFF]  61.21,29.72 0 top
JP14  STAND-OFF  [STAND-OFF]  81.53,29.72 0 top
JP15  FIDUCIAL1X2  [FIDUCIAL-1X2]  83.19,7.75 0 top
JP16  FIDUCIAL1X2  [FIDUCIAL-1X2]  59.44,31.5 0 top
JP17  FIDUCIAL1X2  [FIDUCIAL-1X2]  59.44,31.5 0 bottom
JP18  FIDUCIAL1X2  [FIDUCIAL-1X2]  83.19,7.75 0 bottom
JP19  STAND-OFF  [STAND-OFF]  87.12,29.72 0 top
JP20  STAND-OFF  [STAND-OFF]  107.44,29.72 0 top
JP21  FIDUCIAL1X2  [FIDUCIAL-1X2]  109.09,7.75 0 top
JP22  FIDUCIAL1X2  [FIDUCIAL-1X2]  85.34,31.5 0 top
JP23  FIDUCIAL1X2  [FIDUCIAL-1X2]  85.34,31.5 0 bottom
JP24  FIDUCIAL1X2  [FIDUCIAL-1X2]  109.09,7.75 0 bottom
JP25  STAND-OFF  [STAND-OFF]  113.03,29.72 0 top
JP26  STAND-OFF  [STAND-OFF]  133.35,29.72 0 top
JP27  FIDUCIAL1X2  [FIDUCIAL-1X2]  135,7.75 0 top
JP28  FIDUCIAL1X2  [FIDUCIAL-1X2]  111.25,31.5 0 top
JP29  FIDUCIAL1X2  [FIDUCIAL-1X2]  111.25,31.5 0 bottom
JP30  FIDUCIAL1X2  [FIDUCIAL-1X2]  135,7.75 0 bottom
JP31  STAND-OFF  [STAND-OFF]  9.4,55.63 0 top
JP32  STAND-OFF  [STAND-OFF]  29.72,55.63 0 top
JP33  FIDUCIAL1X2  [FIDUCIAL-1X2]  31.37,33.66 0 top
JP34  FIDUCIAL1X2  [FIDUCIAL-1X2]  7.62,57.4 0 top
JP35  FIDUCIAL1X2  [FIDUCIAL-1X2]  7.62,57.4 0 bottom
JP36  FIDUCIAL1X2  [FIDUCIAL-1X2]  31.37,33.66 0 bottom
JP37  STAND-OFF  [STAND-OFF]  35.31,55.63 0 top
JP38  STAND-OFF  [STAND-OFF]  55.63,55.63 0 top
JP39  FIDUCIAL1X2  [FIDUCIAL-1X2]  57.28,33.66 0 top
JP40  FIDUCIAL1X2  [FIDUCIAL-1X2]  33.53,57.4 0 top
JP41  FIDUCIAL1X2  [FIDUCIAL-1X2]  33.53,57.4 0 bottom
JP42  FIDUCIAL1X2  [FIDUCIAL-1X2]  57.28,33.66 0 bottom
JP43  STAND-OFF  [STAND-OFF]  61.21,55.63 0 top
JP44  STAND-OFF  [STAND-OFF]  81.53,55.63 0 top
JP45  FIDUCIAL1X2  [FIDUCIAL-1X2]  83.19,33.66 0 top
JP46  FIDUCIAL1X2  [FIDUCIAL-1X2]  59.44,57.4 0 top
JP47  FIDUCIAL1X2  [FIDUCIAL-1X2]  59.44,57.4 0 bottom
JP48  FIDUCIAL1X2  [FIDUCIAL-1X2]  83.19,33.66 0 bottom
JP49  STAND-OFF  [STAND-OFF]  87.12,55.63 0 top
JP50  STAND-OFF  [STAND-OFF]  107.44,55.63 0 top
JP51  FIDUCIAL1X2  [FIDUCIAL-1X2]  109.09,33.66 0 top
JP52  FIDUCIAL1X2  [FIDUCIAL-1X2]  85.34,57.4 0 top
JP53  FIDUCIAL1X2  [FIDUCIAL-1X2]  85.34,57.4 0 bottom
JP54  FIDUCIAL1X2  [FIDUCIAL-1X2]  109.09,33.66 0 bottom
JP55  STAND-OFF  [STAND-OFF]  113.03,55.63 0 top
JP56  STAND-OFF  [STAND-OFF]  133.35,55.63 0 top
JP57  FIDUCIAL1X2  [FIDUCIAL-1X2]  135,33.66 0 top
JP58  FIDUCIAL1X2  [FIDUCIAL-1X2]  111.25,57.4 0 top
JP59  FIDUCIAL1X2  [FIDUCIAL-1X2]  111.25,57.4 0 bottom
JP60  FIDUCIAL1X2  [FIDUCIAL-1X2]  135,33.66 0 bottom
JP61  STAND-OFF  [STAND-OFF]  9.4,81.53 0 top
JP62  STAND-OFF  [STAND-OFF]  29.72,81.53 0 top
JP63  FIDUCIAL1X2  [FIDUCIAL-1X2]  31.37,59.56 0 top
JP64  FIDUCIAL1X2  [FIDUCIAL-1X2]  7.62,83.31 0 top
JP65  FIDUCIAL1X2  [FIDUCIAL-1X2]  7.62,83.31 0 bottom
JP66  FIDUCIAL1X2  [FIDUCIAL-1X2]  31.37,59.56 0 bottom
JP67  STAND-OFF  [STAND-OFF]  35.31,81.53 0 top
JP68  STAND-OFF  [STAND-OFF]  55.63,81.53 0 top
JP69  FIDUCIAL1X2  [FIDUCIAL-1X2]  57.28,59.56 0 top
JP70  FIDUCIAL1X2  [FIDUCIAL-1X2]  33.53,83.31 0 top
JP71  FIDUCIAL1X2  [FIDUCIAL-1X2]  33.53,83.31 0 bottom
JP72  FIDUCIAL1X2  [FIDUCIAL-1X2]  57.28,59.56 0 bottom
JP73  STAND-OFF  [STAND-OFF]  61.21,81.53 0 top
JP74  STAND-OFF  [STAND-OFF]  81.53,81.53 0 top
JP75  FIDUCIAL1X2  [FIDUCIAL-1X2]  83.19,59.56 0 top
JP76  FIDUCIAL1X2  [FIDUCIAL-1X2]  59.44,83.31 0 top
JP77  FIDUCIAL1X2  [FIDUCIAL-1X2]  59.44,83.31 0 bottom
JP78  FIDUCIAL1X2  [FIDUCIAL-1X2]  83.19,59.56 0 bottom
JP79  STAND-OFF  [STAND-OFF]  87.12,81.53 0 top
JP80  STAND-OFF  [STAND-OFF]  107.44,81.53 0 top
JP81  FIDUCIAL1X2  [FIDUCIAL-1X2]  109.09,59.56 0 top
JP82  FIDUCIAL1X2  [FIDUCIAL-1X2]  85.34,83.31 0 top
JP83  FIDUCIAL1X2  [FIDUCIAL-1X2]  85.34,83.31 0 bottom
JP84  FIDUCIAL1X2  [FIDUCIAL-1X2]  109.09,59.56 0 bottom
JP85  STAND-OFF  [STAND-OFF]  113.03,81.53 0 top
JP86  STAND-OFF  [STAND-OFF]  133.35,81.53 0 top
JP87  FIDUCIAL1X2  [FIDUCIAL-1X2]  135,59.56 0 top
JP88  FIDUCIAL1X2  [FIDUCIAL-1X2]  111.25,83.31 0 top
JP89  FIDUCIAL1X2  [FIDUCIAL-1X2]  111.25,83.31 0 bottom
JP90  FIDUCIAL1X2  [FIDUCIAL-1X2]  135,59.56 0 bottom
JP91  STAND-OFF  [STAND-OFF]  9.4,107.44 0 top
JP92  STAND-OFF  [STAND-OFF]  29.72,107.44 0 top
JP93  FIDUCIAL1X2  [FIDUCIAL-1X2]  31.37,85.47 0 top
JP94  FIDUCIAL1X2  [FIDUCIAL-1X2]  7.62,109.22 0 top
JP95  FIDUCIAL1X2  [FIDUCIAL-1X2]  7.62,109.22 0 bottom
JP96  FIDUCIAL1X2  [FIDUCIAL-1X2]  31.37,85.47 0 bottom
JP97  STAND-OFF  [STAND-OFF]  35.31,107.44 0 top
JP98  STAND-OFF  [STAND-OFF]  55.63,107.44 0 top
JP99  FIDUCIAL1X2  [FIDUCIAL-1X2]  57.28,85.47 0 top
JP100  FIDUCIAL1X2  [FIDUCIAL-1X2]  33.53,109.22 0 top
JP101  FIDUCIAL1X2  [FIDUCIAL-1X2]  33.53,109.22 0 bottom
JP102  FIDUCIAL1X2  [FIDUCIAL-1X2]  57.28,85.47 0 bottom
JP103  STAND-OFF  [STAND-OFF]  61.21,107.44 0 top
JP104  STAND-OFF  [STAND-OFF]  81.53,107.44 0 top
JP105  FIDUCIAL1X2  [FIDUCIAL-1X2]  83.19,85.47 0 top
JP106  FIDUCIAL1X2  [FIDUCIAL-1X2]  59.44,109.22 0 top
JP107  FIDUCIAL1X2  [FIDUCIAL-1X2]  59.44,109.22 0 bottom
JP108  FIDUCIAL1X2  [FIDUCIAL-1X2]  83.19,85.47 0 bottom
JP109  STAND-OFF  [STAND-OFF]  87.12,107.44 0 top
JP110  STAND-OFF  [STAND-OFF]  107.44,107.44 0 top
JP111  FIDUCIAL1X2  [FIDUCIAL-1X2]  109.09,85.47 0 top
JP112  FIDUCIAL1X2  [FIDUCIAL-1X2]  85.34,109.22 0 top
JP113  FIDUCIAL1X2  [FIDUCIAL-1X2]  85.34,109.22 0 bottom
JP114  FIDUCIAL1X2  [FIDUCIAL-1X2]  109.09,85.47 0 bottom
JP115  STAND-OFF  [STAND-OFF]  113.03,107.44 0 top
JP116  STAND-OFF  [STAND-OFF]  133.35,107.44 0 top
JP117  FIDUCIAL1X2  [FIDUCIAL-1X2]  135,85.47 0 top
JP118  FIDUCIAL1X2  [FIDUCIAL-1X2]  111.25,109.22 0 top
JP119  FIDUCIAL1X2  [FIDUCIAL-1X2]  111.25,109.22 0 bottom
JP120  FIDUCIAL1X2  [FIDUCIAL-1X2]  135,85.47 0 bottom
JP121  STAND-OFF  [STAND-OFF]  9.4,133.35 0 top
JP122  STAND-OFF  [STAND-OFF]  29.72,133.35 0 top
JP123  FIDUCIAL1X2  [FIDUCIAL-1X2]  31.37,111.38 0 top
JP124  FIDUCIAL1X2  [FIDUCIAL-1X2]  7.62,135.13 0 top
JP125  FIDUCIAL1X2  [FIDUCIAL-1X2]  7.62,135.13 0 bottom
JP126  FIDUCIAL1X2  [FIDUCIAL-1X2]  31.37,111.38 0 bottom
JP127  STAND-OFF  [STAND-OFF]  35.31,133.35 0 top
JP128  STAND-OFF  [STAND-OFF]  55.63,133.35 0 top
JP129  FIDUCIAL1X2  [FIDUCIAL-1X2]  57.28,111.38 0 top
JP130  FIDUCIAL1X2  [FIDUCIAL-1X2]  33.53,135.13 0 top
JP131  FIDUCIAL1X2  [FIDUCIAL-1X2]  33.53,135.13 0 bottom
JP132  FIDUCIAL1X2  [FIDUCIAL-1X2]  57.28,111.38 0 bottom
JP133  STAND-OFF  [STAND-OFF]  61.21,133.35 0 top
JP134  STAND-OFF  [STAND-OFF]  81.53,133.35 0 top
JP135  FIDUCIAL1X2  [FIDUCIAL-1X2]  83.19,111.38 0 top
JP136  FIDUCIAL1X2  [FIDUCIAL-1X2]  59.44,135.13 0 top
JP137  FIDUCIAL1X2  [FIDUCIAL-1X2]  59.44,135.13 0 bottom
JP138  FIDUCIAL1X2  [FIDUCIAL-1X2]  83.19,111.38 0 bottom
JP139  STAND-OFF  [STAND-OFF]  87.12,133.35 0 top
JP140  STAND-OFF  [STAND-OFF]  107.44,133.35 0 top
JP141  FIDUCIAL1X2  [FIDUCIAL-1X2]  109.09,111.38 0 top
JP142  FIDUCIAL1X2  [FIDUCIAL-1X2]  85.34,135.13 0 top
JP143  FIDUCIAL1X2  [FIDUCIAL-1X2]  85.34,135.13 0 bottom
JP144  FIDUCIAL1X2  [FIDUCIAL-1X2]  109.09,111.38 0 bottom
JP145  STAND-OFF  [STAND-OFF]  113.03,133.35 0 top
JP146  STAND-OFF  [STAND-OFF]  133.35,133.35 0 top
JP147  FIDUCIAL1X2  [FIDUCIAL-1X2]  135,111.38 0 top
JP148  FIDUCIAL1X2  [FIDUCIAL-1X2]  111.25,135.13 0 top
JP149  FIDUCIAL1X2  [FIDUCIAL-1X2]  111.25,135.13 0 bottom
JP150  FIDUCIAL1X2  [FIDUCIAL-1X2]  135,111.38 0 bottom
LOGO1  OSHW-LOGOMINI  [OSHW-LOGO-MINI]  29.08,10.67 0 bottom
LOGO2  OSHW-LOGOMINI  [OSHW-LOGO-MINI]  54.99,10.67 0 bottom
LOGO3  OSHW-LOGOMINI  [OSHW-LOGO-MINI]  80.9,10.67 0 bottom
LOGO4  OSHW-LOGOMINI  [OSHW-LOGO-MINI]  106.81,10.67 0 bottom
LOGO5  OSHW-LOGOMINI  [OSHW-LOGO-MINI]  132.72,10.67 0 bottom
LOGO6  OSHW-LOGOMINI  [OSHW-LOGO-MINI]  29.08,36.58 0 bottom
LOGO7  OSHW-LOGOMINI  [OSHW-LOGO-MINI]  54.99,36.58 0 bottom
LOGO8  OSHW-LOGOMINI  [OSHW-LOGO-MINI]  80.9,36.58 0 bottom
LOGO9  OSHW-LOGOMINI  [OSHW-LOGO-MINI]  106.81,36.58 0 bottom
LOGO10  OSHW-LOGOMINI  [OSHW-LOGO-MINI]  132.72,36.58 0 bottom
LOGO11  OSHW-LOGOMINI  [OSHW-LOGO-MINI]  29.08,62.48 0 bottom
LOGO12  OSHW-LOGOMINI  [OSHW-LOGO-MINI]  54.99,62.48 0 bottom
LOGO13  OSHW-LOGOMINI  [OSHW-LOGO-MINI]  80.9,62.48 0 bottom
LOGO14  OSHW-LOGOMINI  [OSHW-LOGO-MINI]  106.81,62.48 0 bottom
LOGO15  OSHW-LOGOMINI  [OSHW-LOGO-MINI]  132.72,62.48 0 bottom
LOGO16  OSHW-LOGOMINI  [OSHW-LOGO-MINI]  29.08,88.39 0 bottom
LOGO17  OSHW-LOGOMINI  [OSHW-LOGO-MINI]  54.99,88.39 0 bottom
LOGO18  OSHW-LOGOMINI  [OSHW-LOGO-MINI]  80.9,88.39 0 bottom
LOGO19  OSHW-LOGOMINI  [OSHW-LOGO-MINI]  106.81,88.39 0 bottom
LOGO20  OSHW-LOGOMINI  [OSHW-LOGO-MINI]  132.72,88.39 0 bottom
LOGO21  OSHW-LOGOMINI  [OSHW-LOGO-MINI]  29.08,114.3 0 bottom
LOGO22  OSHW-LOGOMINI  [OSHW-LOGO-MINI]  54.99,114.3 0 bottom
LOGO23  OSHW-LOGOMINI  [OSHW-LOGO-MINI]  80.9,114.3 0 bottom
LOGO24  OSHW-LOGOMINI  [OSHW-LOGO-MINI]  106.81,114.3 0 bottom
LOGO25  OSHW-LOGOMINI  [OSHW-LOGO-MINI]  132.72,114.3 0 bottom
OUT_LED  OUT_LED  [SMT-JUMPER_2_NC_TRACE_SILK]  27.18,14.48 0 bottom
OUT_LED1  OUT_LED  [SMT-JUMPER_2_NC_TRACE_SILK]  53.09,14.48 0 bottom
OUT_LED2  OUT_LED  [SMT-JUMPER_2_NC_TRACE_SILK]  78.99,14.48 0 bottom
OUT_LED3  OUT_LED  [SMT-JUMPER_2_NC_TRACE_SILK]  104.9,14.48 0 bottom
OUT_LED4  OUT_LED  [SMT-JUMPER_2_NC_TRACE_SILK]  130.81,14.48 0 bottom
OUT_LED5  OUT_LED  [SMT-JUMPER_2_NC_TRACE_SILK]  27.18,40.39 0 bottom
OUT_LED6  OUT_LED  [SMT-JUMPER_2_NC_TRACE_SILK]  53.09,40.39 0 bottom
OUT_LED7  OUT_LED  [SMT-JUMPER_2_NC_TRACE_SILK]  78.99,40.39 0 bottom
OUT_LED8  OUT_LED  [SMT-JUMPER_2_NC_TRACE_SILK]  104.9,40.39 0 bottom
OUT_LED9  OUT_LED  [SMT-JUMPER_2_NC_TRACE_SILK]  130.81,40.39 0 bottom
OUT_LED10  OUT_LED  [SMT-JUMPER_2_NC_TRACE_SILK]  27.18,66.29 0 bottom
OUT_LED11  OUT_LED  [SMT-JUMPER_2_NC_TRACE_SILK]  53.09,66.29 0 bottom
OUT_LED12  OUT_LED  [SMT-JUMPER_2_NC_TRACE_SILK]  78.99,66.29 0 bottom
OUT_LED13  OUT_LED  [SMT-JUMPER_2_NC_TRACE_SILK]  104.9,66.29 0 bottom
OUT_LED14  OUT_LED  [SMT-JUMPER_2_NC_TRACE_SILK]  130.81,66.29 0 bottom
OUT_LED15  OUT_LED  [SMT-JUMPER_2_NC_TRACE_SILK]  27.18,92.2 0 bottom
OUT_LED16  OUT_LED  [SMT-JUMPER_2_NC_TRACE_SILK]  53.09,92.2 0 bottom
OUT_LED17  OUT_LED  [SMT-JUMPER_2_NC_TRACE_SILK]  78.99,92.2 0 bottom
OUT_LED18  OUT_LED  [SMT-JUMPER_2_NC_TRACE_SILK]  104.9,92.2 0 bottom
OUT_LED19  OUT_LED  [SMT-JUMPER_2_NC_TRACE_SILK]  130.81,92.2 0 bottom
OUT_LED20  OUT_LED  [SMT-JUMPER_2_NC_TRACE_SILK]  27.18,118.11 0 bottom
OUT_LED21  OUT_LED  [SMT-JUMPER_2_NC_TRACE_SILK]  53.09,118.11 0 bottom
OUT_LED22  OUT_LED  [SMT-JUMPER_2_NC_TRACE_SILK]  78.99,118.11 0 bottom
OUT_LED23  OUT_LED  [SMT-JUMPER_2_NC_TRACE_SILK]  104.9,118.11 0 bottom
OUT_LED24  OUT_LED  [SMT-JUMPER_2_NC_TRACE_SILK]  130.81,118.11 0 bottom
Q1  20V/4.2A/52mΩ/1.4W  [SOT23-3]  18.8,24 180 top
Q2  20V/4.2A/52mΩ/1.4W  [SOT23-3]  44.7,24 180 top
Q3  20V/4.2A/52mΩ/1.4W  [SOT23-3]  70.61,24 180 top
Q4  20V/4.2A/52mΩ/1.4W  [SOT23-3]  96.52,24 180 top
Q5  20V/4.2A/52mΩ/1.4W  [SOT23-3]  122.43,24 180 top
Q6  20V/4.2A/52mΩ/1.4W  [SOT23-3]  18.8,49.91 180 top
Q7  20V/4.2A/52mΩ/1.4W  [SOT23-3]  44.7,49.91 180 top
Q8  20V/4.2A/52mΩ/1.4W  [SOT23-3]  70.61,49.91 180 top
Q9  20V/4.2A/52mΩ/1.4W  [SOT23-3]  96.52,49.91 180 top
Q10  20V/4.2A/52mΩ/1.4W  [SOT23-3]  122.43,49.91 180 top
Q11  20V/4.2A/52mΩ/1.4W  [SOT23-3]  18.8,75.82 180 top
Q12  20V/4.2A/52mΩ/1.4W  [SOT23-3]  44.7,75.82 180 top
Q13  20V/4.2A/52mΩ/1.4W  [SOT23-3]  70.61,75.82 180 top
Q14  20V/4.2A/52mΩ/1.4W  [SOT23-3]  96.52,75.82 180 top
Q15  20V/4.2A/52mΩ/1.4W  [SOT23-3]  122.43,75.82 180 top
Q16  20V/4.2A/52mΩ/1.4W  [SOT23-3]  18.8,101.73 180 top
Q17  20V/4.2A/52mΩ/1.4W  [SOT23-3]  44.7,101.73 180 top
Q18  20V/4.2A/52mΩ/1.4W  [SOT23-3]  70.61,101.73 180 top
Q19  20V/4.2A/52mΩ/1.4W  [SOT23-3]  96.52,101.73 180 top
Q20  20V/4.2A/52mΩ/1.4W  [SOT23-3]  122.43,101.73 180 top
Q21  20V/4.2A/52mΩ/1.4W  [SOT23-3]  18.8,127.64 180 top
Q22  20V/4.2A/52mΩ/1.4W  [SOT23-3]  44.7,127.64 180 top
Q23  20V/4.2A/52mΩ/1.4W  [SOT23-3]  70.61,127.64 180 top
Q24  20V/4.2A/52mΩ/1.4W  [SOT23-3]  96.52,127.64 180 top
Q25  20V/4.2A/52mΩ/1.4W  [SOT23-3]  122.43,127.64 180 top
R1  1k  [0603]  9.4,25.91 0 top
R2  470  [0603]  29.72,13.21 180 top
R3  2.2k  [0603]  10.03,13.21 180 top
R4  2.2k  [0603]  10.03,10.54 180 top
R5  1k  [0603]  22.61,24.26 90 top
R6  2.2k  [0603]  24.64,24.26 270 top
R7  2.2k  [0603]  28.83,25.91 0 top
R8  200k  [0603]  17.65,17.02 180 top
R9  2.2k  [0603]  35.94,13.21 180 top
R10  2.2k  [0603]  35.94,10.54 180 top
R11  1k  [0603]  35.31,25.91 0 top
R12  470  [0603]  55.63,13.21 180 top
R13  1k  [0603]  48.51,24.26 90 top
R14  2.2k  [0603]  50.55,24.26 270 top
R15  2.2k  [0603]  54.74,25.91 0 top
R16  200k  [0603]  43.56,17.02 180 top
R17  2.2k  [0603]  61.85,13.21 180 top
R18  2.2k  [0603]  61.85,10.54 180 top
R19  1k  [0603]  61.21,25.91 0 top
R20  470  [0603]  81.53,13.21 180 top
R21  1k  [0603]  74.42,24.26 90 top
R22  2.2k  [0603]  76.45,24.26 270 top
R23  2.2k  [0603]  80.65,25.91 0 top
R24  200k  [0603]  69.47,17.02 180 top
R25  2.2k  [0603]  87.76,13.21 180 top
R26  2.2k  [0603]  87.76,10.54 180 top
R27  1k  [0603]  87.12,25.91 0 top
R28  470  [0603]  107.44,13.21 180 top
R29  1k  [0603]  100.33,24.26 90 top
R30  2.2k  [0603]  102.36,24.26 270 top
R31  2.2k  [0603]  106.55,25.91 0 top
R32  200k  [0603]  95.38,17.02 180 top
R33  2.2k  [0603]  113.67,13.21 180 top
R34  2.2k  [0603]  113.67,10.54 180 top
R35  1k  [0603]  113.03,25.91 0 top
R36  470  [0603]  133.35,13.21 180 top
R37  1k  [0603]  126.24,24.26 90 top
R38  2.2k  [0603]  128.27,24.26 270 top
R39  2.2k  [0603]  132.46,25.91 0 top
R40  200k  [0603]  121.29,17.02 180 top
R41  2.2k  [0603]  10.03,39.12 180 top
R42  2.2k  [0603]  10.03,36.45 180 top
R43  1k  [0603]  9.4,51.82 0 top
R44  470  [0603]  29.72,39.12 180 top
R45  1k  [0603]  22.61,50.16 90 top
R46  2.2k  [0603]  24.64,50.16 270 top
R47  2.2k  [0603]  28.83,51.82 0 top
R48  200k  [0603]  17.65,42.93 180 top
R49  2.2k  [0603]  35.94,39.12 180 top
R50  2.2k  [0603]  35.94,36.45 180 top
R51  1k  [0603]  35.31,51.82 0 top
R52  470  [0603]  55.63,39.12 180 top
R53  1k  [0603]  48.51,50.16 90 top
R54  2.2k  [0603]  50.55,50.16 270 top
R55  2.2k  [0603]  54.74,51.82 0 top
R56  200k  [0603]  43.56,42.93 180 top
R57  2.2k  [0603]  61.85,39.12 180 top
R58  2.2k  [0603]  61.85,36.45 180 top
R59  1k  [0603]  61.21,51.82 0 top
R60  470  [0603]  81.53,39.12 180 top
R61  1k  [0603]  74.42,50.16 90 top
R62  2.2k  [0603]  76.45,50.16 270 top
R63  2.2k  [0603]  80.65,51.82 0 top
R64  200k  [0603]  69.47,42.93 180 top
R65  2.2k  [0603]  87.76,39.12 180 top
R66  2.2k  [0603]  87.76,36.45 180 top
R67  1k  [0603]  87.12,51.82 0 top
R68  470  [0603]  107.44,39.12 180 top
R69  1k  [0603]  100.33,50.16 90 top
R70  2.2k  [0603]  102.36,50.16 270 top
R71  2.2k  [0603]  106.55,51.82 0 top
R72  200k  [0603]  95.38,42.93 180 top
R73  2.2k  [0603]  113.67,39.12 180 top
R74  2.2k  [0603]  113.67,36.45 180 top
R75  1k  [0603]  113.03,51.82 0 top
R76  470  [0603]  133.35,39.12 180 top
R77  1k  [0603]  126.24,50.16 90 top
R78  2.2k  [0603]  128.27,50.16 270 top
R79  2.2k  [0603]  132.46,51.82 0 top
R80  200k  [0603]  121.29,42.93 180 top
R81  2.2k  [0603]  10.03,65.02 180 top
R82  2.2k  [0603]  10.03,62.36 180 top
R83  1k  [0603]  9.4,77.72 0 top
R84  470  [0603]  29.72,65.02 180 top
R85  1k  [0603]  22.61,76.07 90 top
R86  2.2k  [0603]  24.64,76.07 270 top
R87  2.2k  [0603]  28.83,77.72 0 top
R88  200k  [0603]  17.65,68.83 180 top
R89  2.2k  [0603]  35.94,65.02 180 top
R90  2.2k  [0603]  35.94,62.36 180 top
R91  1k  [0603]  35.31,77.72 0 top
R92  470  [0603]  55.63,65.02 180 top
R93  1k  [0603]  48.51,76.07 90 top
R94  2.2k  [0603]  50.55,76.07 270 top
R95  2.2k  [0603]  54.74,77.72 0 top
R96  200k  [0603]  43.56,68.83 180 top
R97  2.2k  [0603]  61.85,65.02 180 top
R98  2.2k  [0603]  61.85,62.36 180 top
R99  1k  [0603]  61.21,77.72 0 top
R100  470  [0603]  81.53,65.02 180 top
R101  1k  [0603]  74.42,76.07 90 top
R102  2.2k  [0603]  76.45,76.07 270 top
R103  2.2k  [0603]  80.65,77.72 0 top
R104  200k  [0603]  69.47,68.83 180 top
R105  2.2k  [0603]  87.76,65.02 180 top
R106  2.2k  [0603]  87.76,62.36 180 top
R107  1k  [0603]  87.12,77.72 0 top
R108  470  [0603]  107.44,65.02 180 top
R109  1k  [0603]  100.33,76.07 90 top
R110  2.2k  [0603]  102.36,76.07 270 top
R111  2.2k  [0603]  106.55,77.72 0 top
R112  200k  [0603]  95.38,68.83 180 top
R113  2.2k  [0603]  113.67,65.02 180 top
R114  2.2k  [0603]  113.67,62.36 180 top
R115  1k  [0603]  113.03,77.72 0 top
R116  470  [0603]  133.35,65.02 180 top
R117  1k  [0603]  126.24,76.07 90 top
R118  2.2k  [0603]  128.27,76.07 270 top
R119  2.2k  [0603]  132.46,77.72 0 top
R120  200k  [0603]  121.29,68.83 180 top
R121  2.2k  [0603]  10.03,90.93 180 top
R122  2.2k  [0603]  10.03,88.27 180 top
R123  1k  [0603]  9.4,103.63 0 top
R124  470  [0603]  29.72,90.93 180 top
R125  1k  [0603]  22.61,101.98 90 top
R126  2.2k  [0603]  24.64,101.98 270 top
R127  2.2k  [0603]  28.83,103.63 0 top
R128  200k  [0603]  17.65,94.74 180 top
R129  2.2k  [0603]  35.94,90.93 180 top
R130  2.2k  [0603]  35.94,88.27 180 top
R131  1k  [0603]  35.31,103.63 0 top
R132  470  [0603]  55.63,90.93 180 top
R133  1k  [0603]  48.51,101.98 90 top
R134  2.2k  [0603]  50.55,101.98 270 top
R135  2.2k  [0603]  54.74,103.63 0 top
R136  200k  [0603]  43.56,94.74 180 top
R137  2.2k  [0603]  61.85,90.93 180 top
R138  2.2k  [0603]  61.85,88.27 180 top
R139  1k  [0603]  61.21,103.63 0 top
R140  470  [0603]  81.53,90.93 180 top
R141  1k  [0603]  74.42,101.98 90 top
R142  2.2k  [0603]  76.45,101.98 270 top
R143  2.2k  [0603]  80.65,103.63 0 top
R144  200k  [0603]  69.47,94.74 180 top
R145  2.2k  [0603]  87.76,90.93 180 top
R146  2.2k  [0603]  87.76,88.27 180 top
R147  1k  [0603]  87.12,103.63 0 top
R148  470  [0603]  107.44,90.93 180 top
R149  1k  [0603]  100.33,101.98 90 top
R150  2.2k  [0603]  102.36,101.98 270 top
R151  2.2k  [0603]  106.55,103.63 0 top
R152  200k  [0603]  95.38,94.74 180 top
R153  2.2k  [0603]  113.67,90.93 180 top
R154  2.2k  [0603]  113.67,88.27 180 top
R155  1k  [0603]  113.03,103.63 0 top
R156  470  [0603]  133.35,90.93 180 top
R157  1k  [0603]  126.24,101.98 90 top
R158  2.2k  [0603]  128.27,101.98 270 top
R159  2.2k  [0603]  132.46,103.63 0 top
R160  200k  [0603]  121.29,94.74 180 top
R161  2.2k  [0603]  10.03,116.84 180 top
R162  2.2k  [0603]  10.03,114.17 180 top
R163  1k  [0603]  9.4,129.54 0 top
R164  470  [0603]  29.72,116.84 180 top
R165  1k  [0603]  22.61,127.89 90 top
R166  2.2k  [0603]  24.64,127.89 270 top
R167  2.2k  [0603]  28.83,129.54 0 top
R168  200k  [0603]  17.65,120.65 180 top
R169  2.2k  [0603]  35.94,116.84 180 top
R170  2.2k  [0603]  35.94,114.17 180 top
R171  1k  [0603]  35.31,129.54 0 top
R172  470  [0603]  55.63,116.84 180 top
R173  1k  [0603]  48.51,127.89 90 top
R174  2.2k  [0603]  50.55,127.89 270 top
R175  2.2k  [0603]  54.74,129.54 0 top
R176  200k  [0603]  43.56,120.65 180 top
R177  2.2k  [0603]  61.85,116.84 180 top
R178  2.2k  [0603]  61.85,114.17 180 top
R179  1k  [0603]  61.21,129.54 0 top
R180  470  [0603]  81.53,116.84 180 top
R181  1k  [0603]  74.42,127.89 90 top
R182  2.2k  [0603]  76.45,127.89 270 top
R183  2.2k  [0603]  80.65,129.54 0 top
R184  200k  [0603]  69.47,120.65 180 top
R185  2.2k  [0603]  87.76,116.84 180 top
R186  2.2k  [0603]  87.76,114.17 180 top
R187  1k  [0603]  87.12,129.54 0 top
R188  470  [0603]  107.44,116.84 180 top
R189  1k  [0603]  100.33,127.89 90 top
R190  2.2k  [0603]  102.36,127.89 270 top
R191  2.2k  [0603]  106.55,129.54 0 top
R192  200k  [0603]  95.38,120.65 180 top
R193  2.2k  [0603]  113.67,116.84 180 top
R194  2.2k  [0603]  113.67,114.17 180 top
R195  1k  [0603]  113.03,129.54 0 top
R196  470  [0603]  133.35,116.84 180 top
R197  1k  [0603]  126.24,127.89 90 top
R198  2.2k  [0603]  128.27,127.89 270 top
R199  2.2k  [0603]  132.46,129.54 0 top
R200  200k  [0603]  121.29,120.65 180 top
U1  74HC1G04  [SOT353]  21.84,15.75 90 top
U2  PCA9536  [MSOP8]  19.56,19.56 180 top
U3  [VSSOP_8PIN]  17.65,14.86 0 top
U4  PCA9536  [MSOP8]  45.47,19.56 180 top
U5  74HC1G04  [SOT353]  47.75,15.75 90 top
U6  [VSSOP_8PIN]  43.56,14.86 0 top
U7  PCA9536  [MSOP8]  71.37,19.56 180 top
U8  74HC1G04  [SOT353]  73.66,15.75 90 top
U9  [VSSOP_8PIN]  69.47,14.86 0 top
U10  PCA9536  [MSOP8]  97.28,19.56 180 top
U11  74HC1G04  [SOT353]  99.57,15.75 90 top
U12  [VSSOP_8PIN]  95.38,14.86 0 top
U13  PCA9536  [MSOP8]  123.19,19.56 180 top
U14  74HC1G04  [SOT353]  125.48,15.75 90 top
U15  [VSSOP_8PIN]  121.29,14.86 0 top
U16  PCA9536  [MSOP8]  19.56,45.47 180 top
U17  74HC1G04  [SOT353]  21.84,41.66 90 top
U18  [VSSOP_8PIN]  17.65,40.77 0 top
U19  PCA9536  [MSOP8]  45.47,45.47 180 top
U20  74HC1G04  [SOT353]  47.75,41.66 90 top
U21  [VSSOP_8PIN]  43.56,40.77 0 top
U22  PCA9536  [MSOP8]  71.37,45.47 180 top
U23  74HC1G04  [SOT353]  73.66,41.66 90 top
U24  [VSSOP_8PIN]  69.47,40.77 0 top
U25  PCA9536  [MSOP8]  97.28,45.47 180 top
U26  74HC1G04  [SOT353]  99.57,41.66 90 top
U27  [VSSOP_8PIN]  95.38,40.77 0 top
U28  PCA9536  [MSOP8]  123.19,45.47 180 top
U29  74HC1G04  [SOT353]  125.48,41.66 90 top
U30  [VSSOP_8PIN]  121.29,40.77 0 top
U31  PCA9536  [MSOP8]  19.56,71.37 180 top
U32  74HC1G04  [SOT353]  21.84,67.56 90 top
U33  [VSSOP_8PIN]  17.65,66.67 0 top
U34  PCA9536  [MSOP8]  45.47,71.37 180 top
U35  74HC1G04  [SOT353]  47.75,67.56 90 top
U36  [VSSOP_8PIN]  43.56,66.67 0 top
U37  PCA9536  [MSOP8]  71.37,71.37 180 top
U38  74HC1G04  [SOT353]  73.66,67.56 90 top
U39  [VSSOP_8PIN]  69.47,66.67 0 top
U40  PCA9536  [MSOP8]  97.28,71.37 180 top
U41  74HC1G04  [SOT353]  99.57,67.56 90 top
U42  [VSSOP_8PIN]  95.38,66.67 0 top
U43  PCA9536  [MSOP8]  123.19,71.37 180 top
U44  74HC1G04  [SOT353]  125.48,67.56 90 top
U45  [VSSOP_8PIN]  121.29,66.67 0 top
U46  PCA9536  [MSOP8]  19.56,97.28 180 top
U47  74HC1G04  [SOT353]  21.84,93.47 90 top
U48  [VSSOP_8PIN]  17.65,92.58 0 top
U49  PCA9536  [MSOP8]  45.47,97.28 180 top
U50  74HC1G04  [SOT353]  47.75,93.47 90 top
U51  [VSSOP_8PIN]  43.56,92.58 0 top
U52  PCA9536  [MSOP8]  71.37,97.28 180 top
U53  74HC1G04  [SOT353]  73.66,93.47 90 top
U54  [VSSOP_8PIN]  69.47,92.58 0 top
U55  PCA9536  [MSOP8]  97.28,97.28 180 top
U56  74HC1G04  [SOT353]  99.57,93.47 90 top
U57  [VSSOP_8PIN]  95.38,92.58 0 top
U58  PCA9536  [MSOP8]  123.19,97.28 180 top
U59  74HC1G04  [SOT353]  125.48,93.47 90 top
U60  [VSSOP_8PIN]  121.29,92.58 0 top
U61  PCA9536  [MSOP8]  19.56,123.19 180 top
U62  74HC1G04  [SOT353]  21.84,119.38 90 top
U63  [VSSOP_8PIN]  17.65,118.49 0 top
U64  PCA9536  [MSOP8]  45.47,123.19 180 top
U65  74HC1G04  [SOT353]  47.75,119.38 90 top
U66  [VSSOP_8PIN]  43.56,118.49 0 top
U67  PCA9536  [MSOP8]  71.37,123.19 180 top
U68  74HC1G04  [SOT353]  73.66,119.38 90 top
U69  [VSSOP_8PIN]  69.47,118.49 0 top
U70  PCA9536  [MSOP8]  97.28,123.19 180 top
U71  74HC1G04  [SOT353]  99.57,119.38 90 top
U72  [VSSOP_8PIN]  95.38,118.49 0 top
U73  PCA9536  [MSOP8]  123.19,123.19 180 top
U74  74HC1G04  [SOT353]  125.48,119.38 90 top
U75  [VSSOP_8PIN]  121.29,118.49 0 top
U$1  [IN0]  8,10.79 90 bottom
U$2  SPARKX-LOGO4  [SPARKX-MEDIUM]  19.81,22.73 0 bottom
U$3  [GND1]  17.02,30.61 270 top
U$4  [3#3V0]  19.56,8.51 90 bottom
U$5  [SDA8]  22.1,30.61 270 top
U$6  [SCL9]  24.64,30.61 270 top
U$7  [3#3V0]  19.56,30.61 270 bottom
U$8  [GND1]  22.1,8.51 90 bottom
U$9  [SCL9]  14.48,8.51 90 bottom
U$10  [I_SUPER2_C-()-03]  8,8.64 90 bottom
U$11  [SDA8]  17.02,8.51 90 bottom
U$12  [3#3V0]  19.56,30.61 270 top
U$13  [GND1]  22.1,8.51 90 top
U$14  [OUT0]  30.99,25.15 270 bottom
U$15  [SDA8]  17.02,8.51 90 top
U$16  [GPIO10]  24.64,8.51 90 bottom
U$17  [SCL9]  14.48,8.51 90 top
U$18  [I_SUPER2_C-()-03]  30.99,27.18 270 bottom
U$19  [QWIIC0]  23.5,20.32 0 bottom
U$20  [GPIO20]  14.48,30.73 270 bottom
U$21  SPARKX-LOGO4  [SPARKX-MEDIUM]  45.72,22.73 0 bottom
U$22  [GND1]  17.02,30.61 270 bottom
U$23  [3#3V0]  19.56,8.51 90 top
U$24  [GPIO10]  24.64,8.51 90 top
U$25  [GPIO20]  14.48,30.73 270 top
U$26  [SCL9]  24.64,30.61 270 bottom
U$27  [SDA8]  22.1,30.61 270 bottom
U$28  [IN0]  7.49,15.11 0 top
U$29  [LED_IN0]  14.35,22.73 0 bottom
U$30  [LED_OUT0]  29.97,16.51 0 bottom
U$31  [OUT0]  26.42,24 0 top
U$32  [POWER0]  23.88,18.41 0 bottom
U$33  [GND1]  42.93,30.61 270 bottom
U$34  [SWITCH0]  24,16.38 0 bottom
U$35  [SCL9]  50.55,30.61 270 bottom
U$36  [SDA8]  48.01,30.61 270 bottom
U$37  [GND1]  42.93,30.61 270 top
U$38  [SDA8]  48.01,30.61 270 top
U$39  [SCL9]  50.55,30.61 270 top
U$40  [I_SUPER2_C-()-03]  33.91,8.64 90 bottom
U$41  [GND1]  48.01,8.51 90 bottom
U$42  [SCL9]  40.39,8.51 90 bottom
U$43  [SDA8]  42.93,8.51 90 bottom
U$44  [GND1]  48.01,8.51 90 top
U$45  [SDA8]  42.93,8.51 90 top
U$46  [SCL9]  40.39,8.51 90 top
U$47  [QWIIC0]  49.4,20.32 0 bottom
U$48  [3#3V0]  45.47,30.61 270 top
U$49  [3#3V0]  45.47,8.51 90 top
U$50  [GPIO10]  50.55,8.51 90 top
U$51  [GPIO20]  40.39,30.73 270 top
U$52  [IN0]  33.4,15.11 0 top
U$53  [LED_IN0]  40.26,22.73 0 bottom
U$54  [LED_OUT0]  55.88,16.51 0 bottom
U$55  [OUT0]  52.32,24 0 top
U$56  [POWER0]  49.78,18.41 0 bottom
U$57  [SWITCH0]  49.91,16.38 0 bottom
U$58  [GPIO10]  50.55,8.51 90 bottom
U$59  [GPIO20]  40.39,30.73 270 bottom
U$60  [3#3V0]  45.47,8.51 90 bottom
U$61  [3#3V0]  45.47,30.61 270 bottom
U$62  [IN0]  33.91,10.79 90 bottom
U$63  [OUT0]  56.9,25.15 270 bottom
U$64  [I_SUPER2_C-()-03]  56.9,27.18 270 bottom
U$65  SPARKX-LOGO4  [SPARKX-MEDIUM]  71.63,22.73 0 bottom
U$66  [GND1]  68.83,30.61 270 bottom
U$67  [SCL9]  76.45,30.61 270 bottom
U$68  [SDA8]  73.91,30.61 270 bottom
U$69  [GND1]  68.83,30.61 270 top
U$70  [SDA8]  73.91,30.61 270 top
U$71  [SCL9]  76.45,30.61 270 top
U$72  [I_SUPER2_C-()-03]  59.82,8.64 90 bottom
U$73  [GND1]  73.91,8.51 90 bottom
U$74  [SCL9]  66.29,8.51 90 bottom
U$75  [SDA8]  68.83,8.51 90 bottom
U$76  [GND1]  73.91,8.51 90 top
U$77  [SDA8]  68.83,8.51 90 top
U$78  [SCL9]  66.29,8.51 90 top
U$79  [QWIIC0]  75.31,20.32 0 bottom
U$80  [3#3V0]  71.37,30.61 270 top
U$81  [3#3V0]  71.37,8.51 90 top
U$82  [GPIO10]  76.45,8.51 90 top
U$83  [GPIO20]  66.29,30.73 270 top
U$84  [IN0]  59.31,15.11 0 top
U$85  [LED_IN0]  66.17,22.73 0 bottom
U$86  [LED_OUT0]  81.79,16.51 0 bottom
U$87  [OUT0]  78.23,24 0 top
U$88  [POWER0]  75.69,18.41 0 bottom
U$89  [SWITCH0]  75.82,16.38 0 bottom
U$90  [GPIO10]  76.45,8.51 90 bottom
U$91  [GPIO20]  66.29,30.73 270 bottom
U$92  [3#3V0]  71.37,8.51 90 bottom
U$93  [3#3V0]  71.37,30.61 270 bottom
U$94  [IN0]  59.82,10.79 90 bottom
U$95  [OUT0]  82.8,25.15 270 bottom
U$96  [I_SUPER2_C-()-03]  82.8,27.18 270 bottom
U$97  SPARKX-LOGO4  [SPARKX-MEDIUM]  97.54,22.73 0 bottom
U$98  [GND1]  94.74,30.61 270 bottom
U$99  [SCL9]  102.36,30.61 270 bottom
U$100  [SDA8]  99.82,30.61 270 bottom
U$101  [GND1]  94.74,30.61 270 top
U$102  [SDA8]  99.82,30.61 270 top
U$103  [SCL9]  102.36,30.61 270 top
U$104  [I_SUPER2_C-()-03]  85.73,8.64 90 bottom
U$105  [GND1]  99.82,8.51 90 bottom
U$106  [SCL9]  92.2,8.51 90 bottom
U$107  [SDA8]  94.74,8.51 90 bottom
U$108  [GND1]  99.82,8.51 90 top
U$109  [SDA8]  94.74,8.51 90 top
U$110  [SCL9]  92.2,8.51 90 top
U$111  [QWIIC0]  101.22,20.32 0 bottom
U$112  [3#3V0]  97.28,30.61 270 top
U$113  [3#3V0]  97.28,8.51 90 top
U$114  [GPIO10]  102.36,8.51 90 top
U$115  [GPIO20]  92.2,30.73 270 top
U$116  [IN0]  85.22,15.11 0 top
U$117  [LED_IN0]  92.08,22.73 0 bottom
U$118  [LED_OUT0]  107.7,16.51 0 bottom
U$119  [OUT0]  104.14,24 0 top
U$120  [POWER0]  101.6,18.41 0 bottom
U$121  [SWITCH0]  101.73,16.38 0 bottom
U$122  [GPIO10]  102.36,8.51 90 bottom
U$123  [GPIO20]  92.2,30.73 270 bottom
U$124  [3#3V0]  97.28,8.51 90 bottom
U$125  [3#3V0]  97.28,30.61 270 bottom
U$126  [IN0]  85.73,10.79 90 bottom
U$127  [OUT0]  108.71,25.15 270 bottom
U$128  [I_SUPER2_C-()-03]  108.71,27.18 270 bottom
U$129  SPARKX-LOGO4  [SPARKX-MEDIUM]  123.44,22.73 0 bottom
U$130  [GND1]  120.65,30.61 270 bottom
U$131  [SCL9]  128.27,30.61 270 bottom
U$132  [SDA8]  125.73,30.61 270 bottom
U$133  [GND1]  120.65,30.61 270 top
U$134  [SDA8]  125.73,30.61 270 top
U$135  [SCL9]  128.27,30.61 270 top
U$136  [I_SUPER2_C-()-03]  111.63,8.64 90 bottom
U$137  [GND1]  125.73,8.51 90 bottom
U$138  [SCL9]  118.11,8.51 90 bottom
U$139  [SDA8]  120.65,8.51 90 bottom
U$140  [GND1]  125.73,8.51 90 top
U$141  [SDA8]  120.65,8.51 90 top
U$142  [SCL9]  118.11,8.51 90 top
U$143  [QWIIC0]  127.13,20.32 0 bottom
U$144  [3#3V0]  123.19,30.61 270 top